# Altium PCB GesturaPCBLayout.PcbDoc (part 1 of 2)
Units mm, origin at the board's own origin, x right, y up, seen from the top; angles counter-clockwise.
Board outline 48.9 x 57.02 mm, 4 copper layers (Top Layer, Ground 1, Ground 2, Bottom Layer), stack 0.603 mm thick; 77 components, 66 nets, 315 pads, 197 vias.
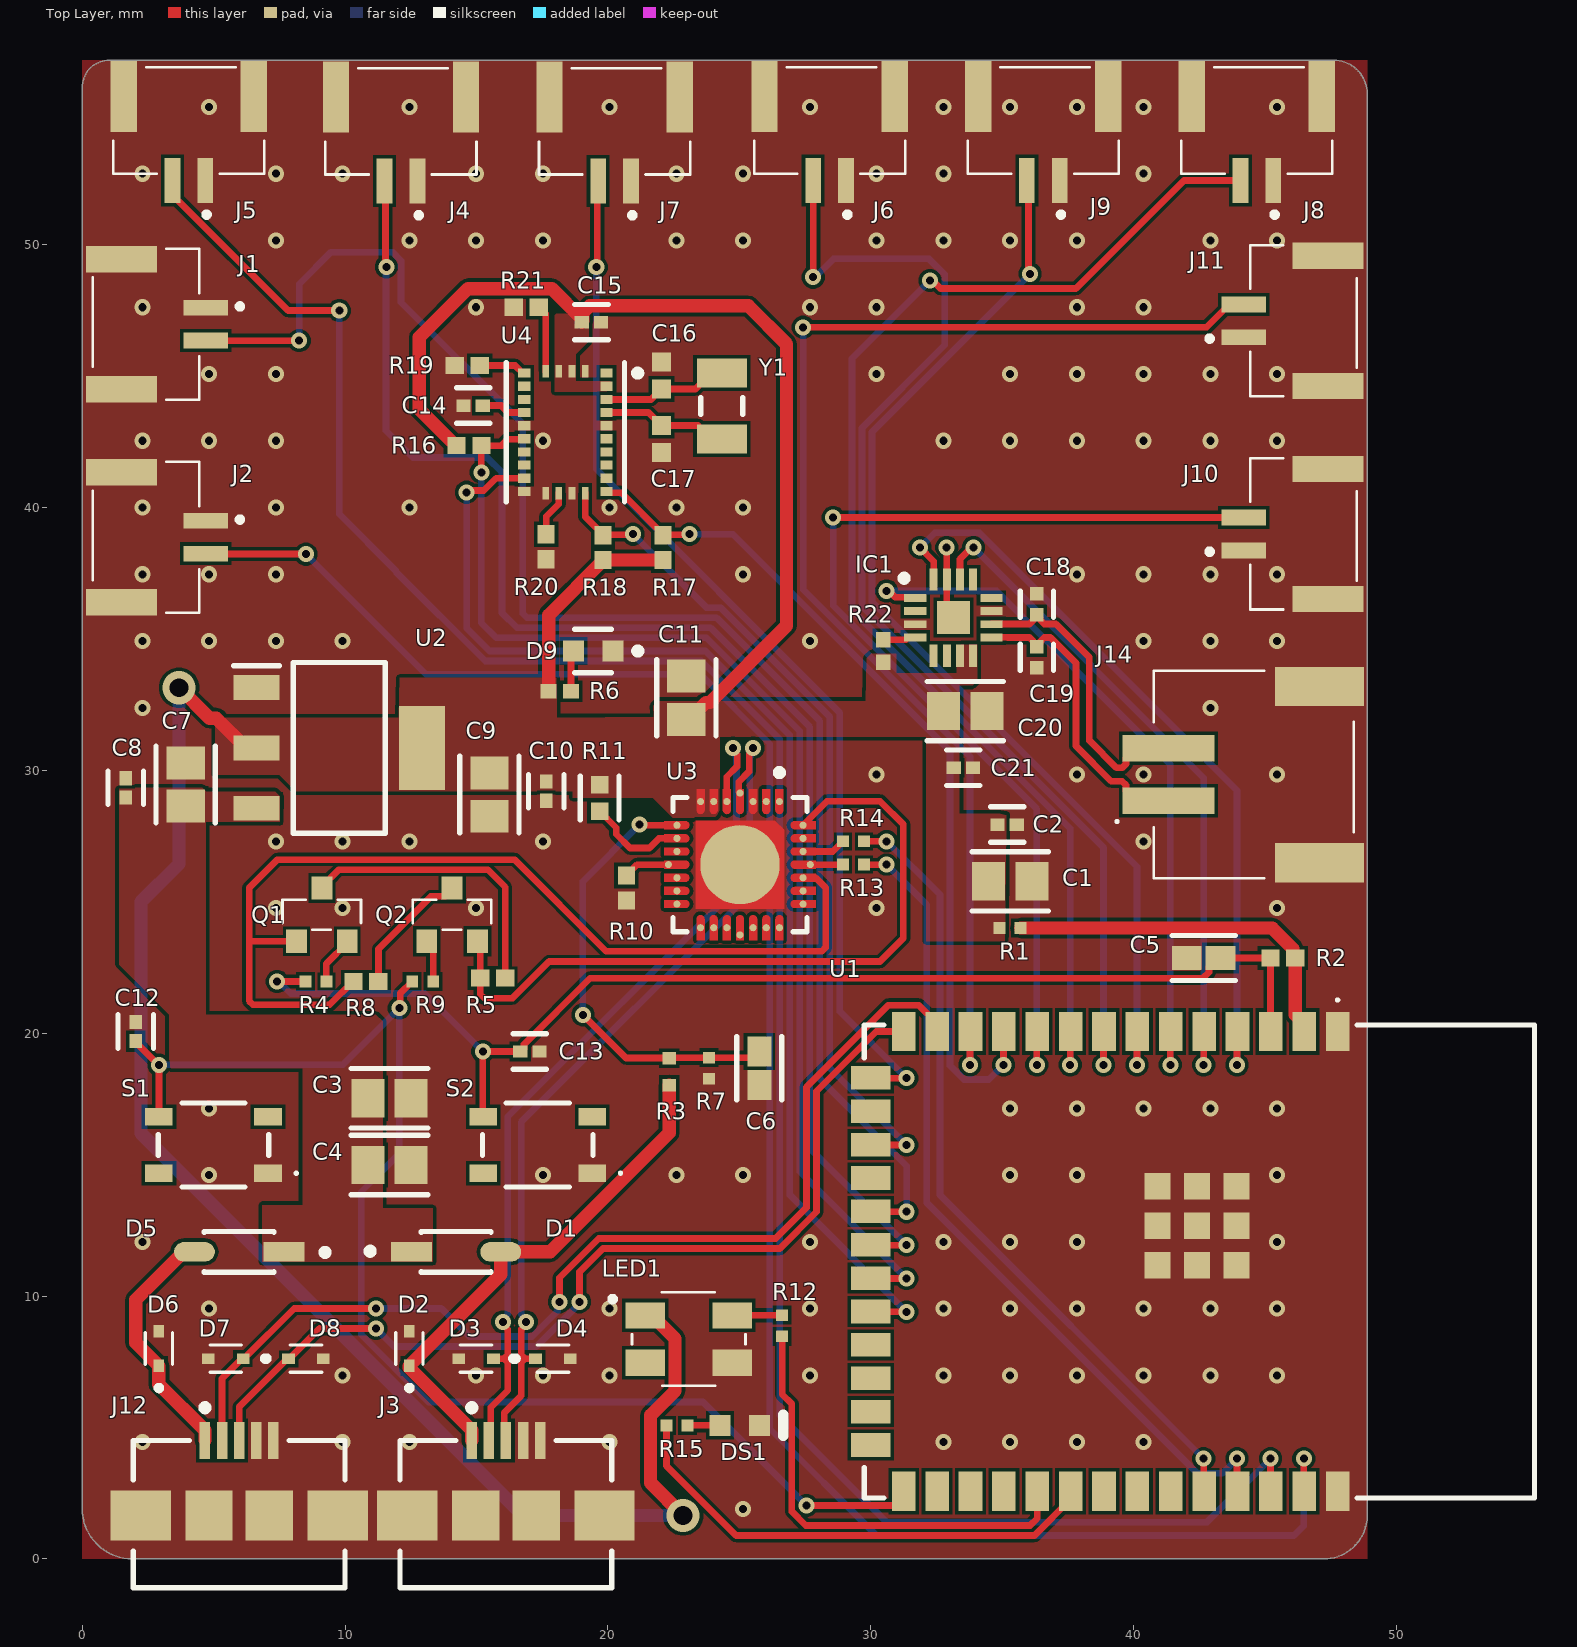
[diagram p0: Top Layer view]
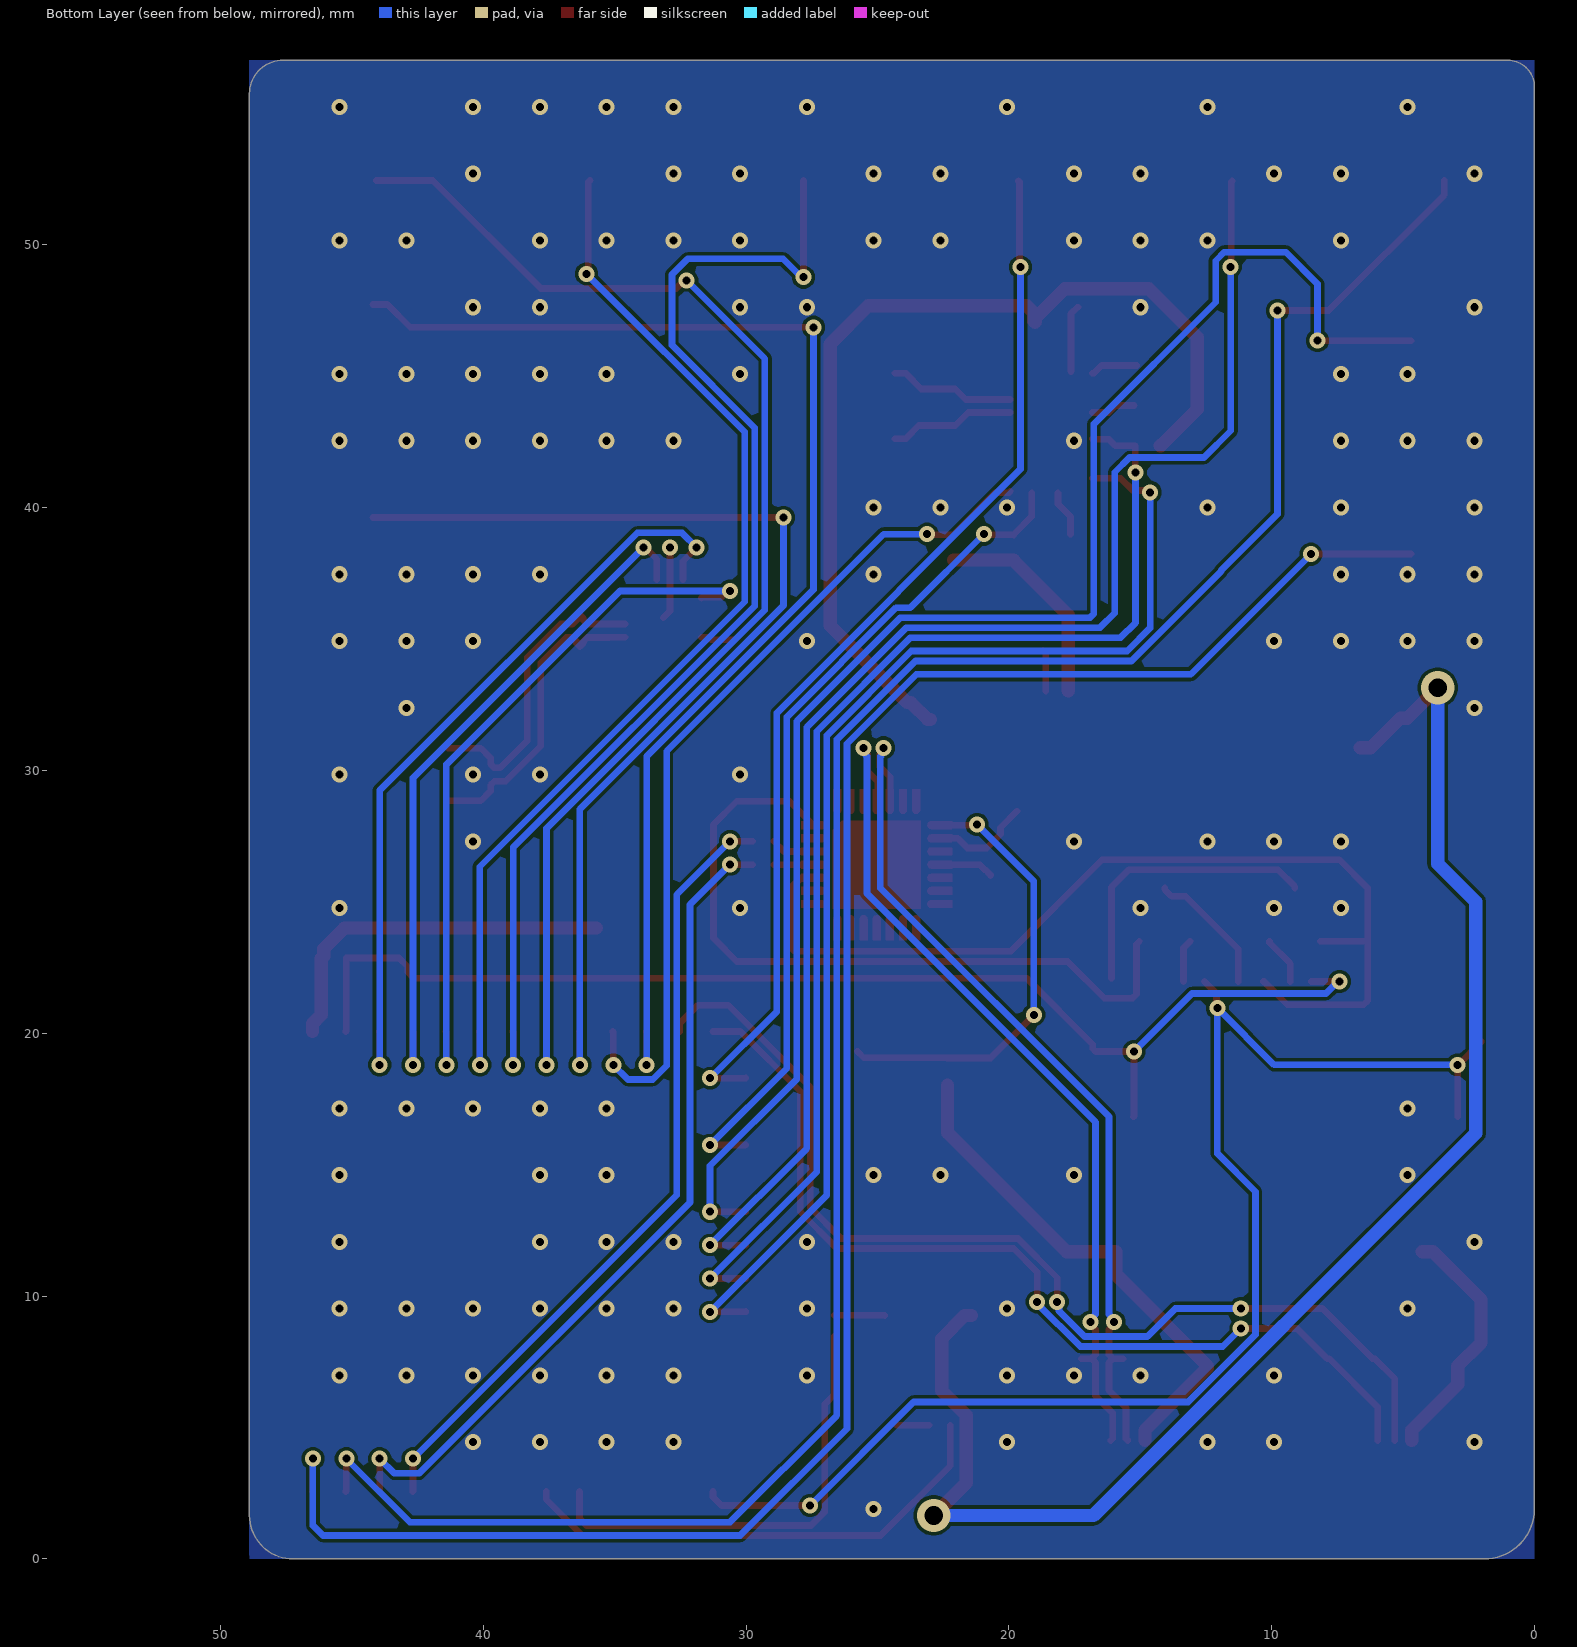
[diagram p1: Bottom Layer view, seen from below]
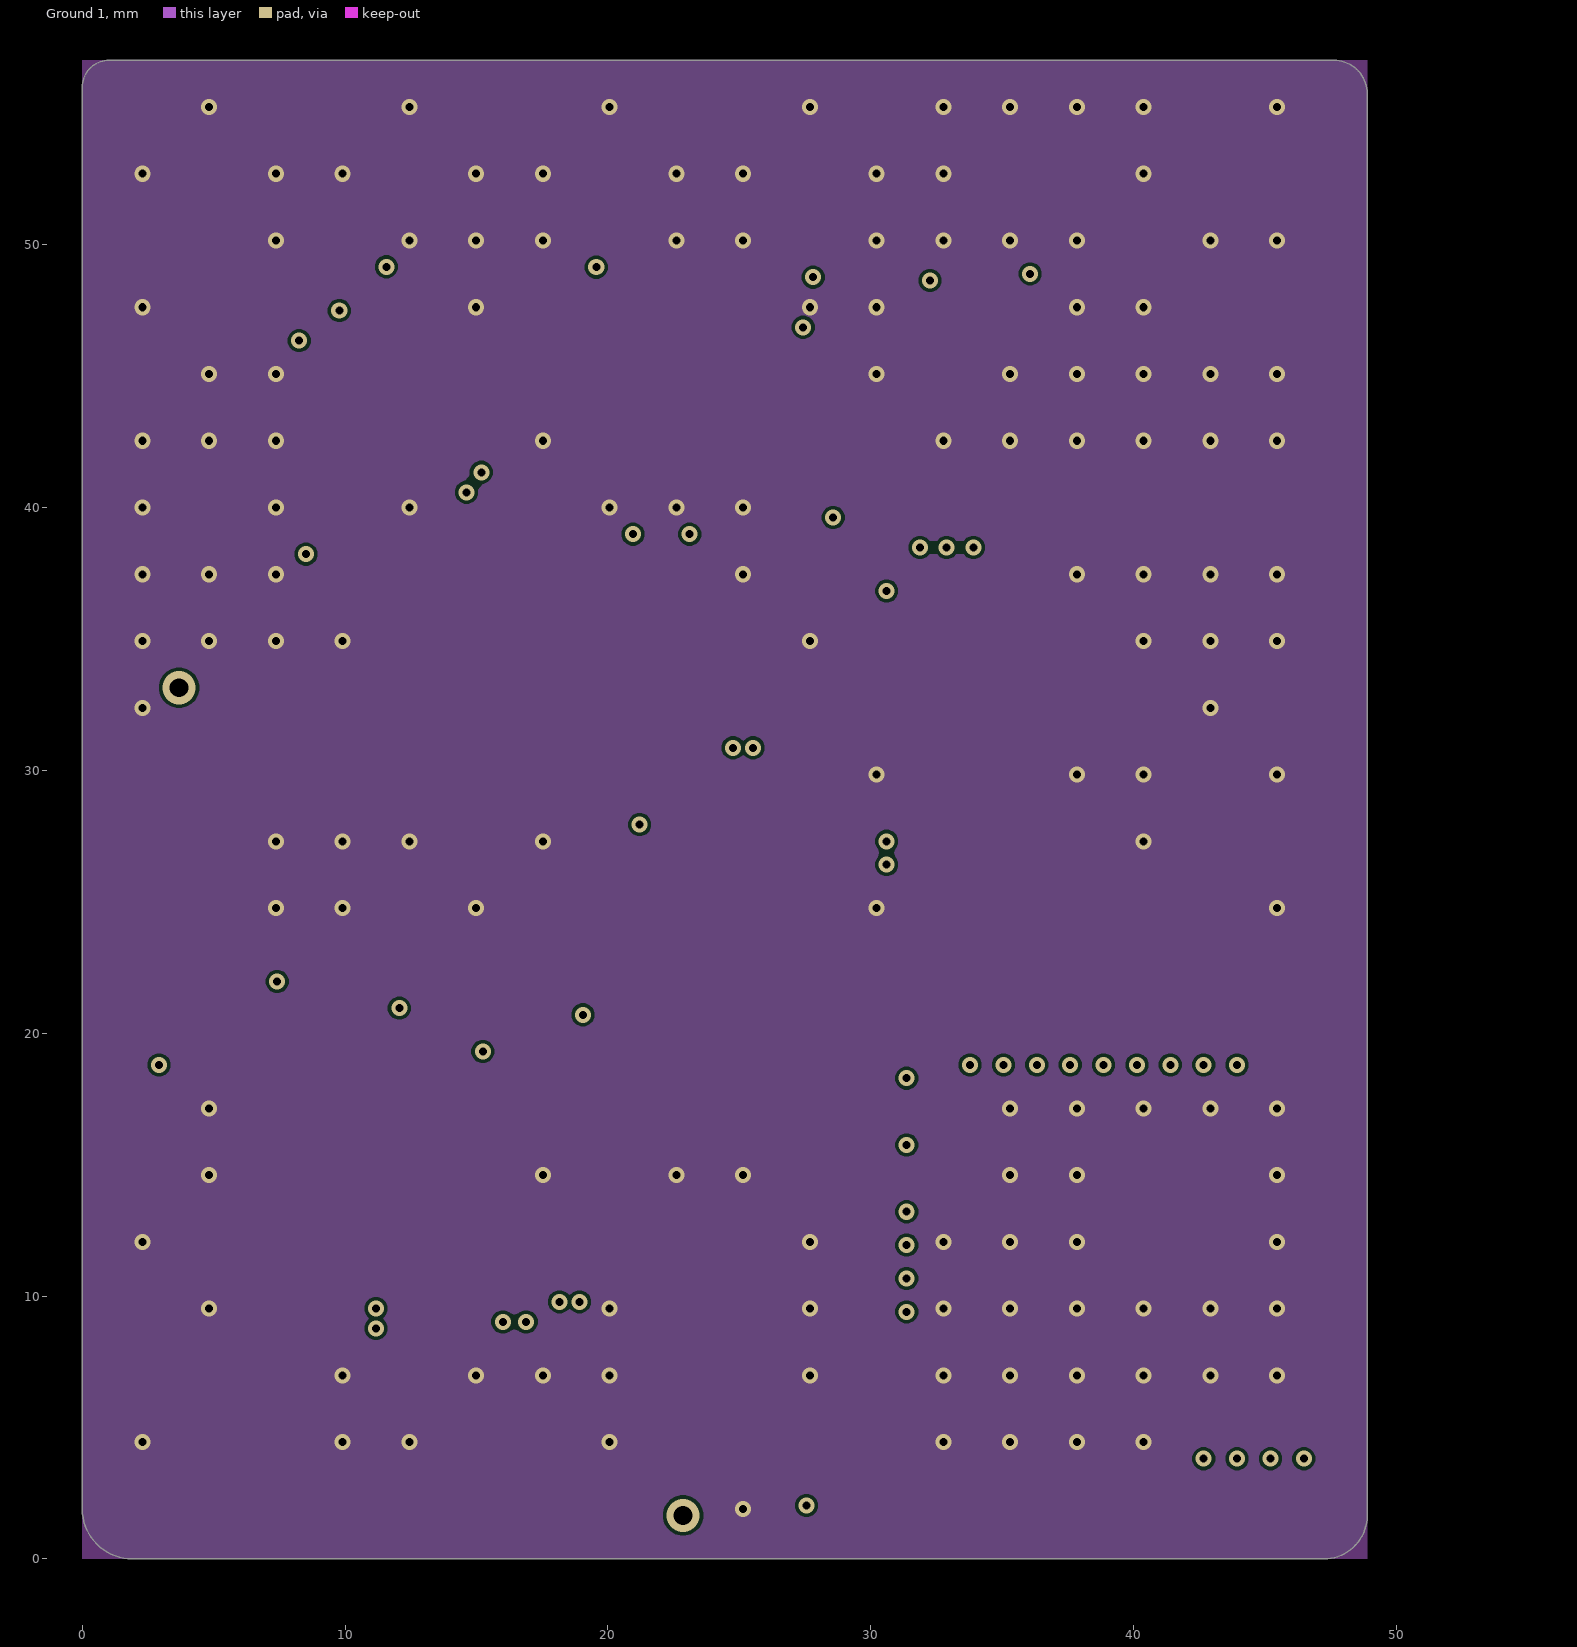
[diagram p2: Ground 1]
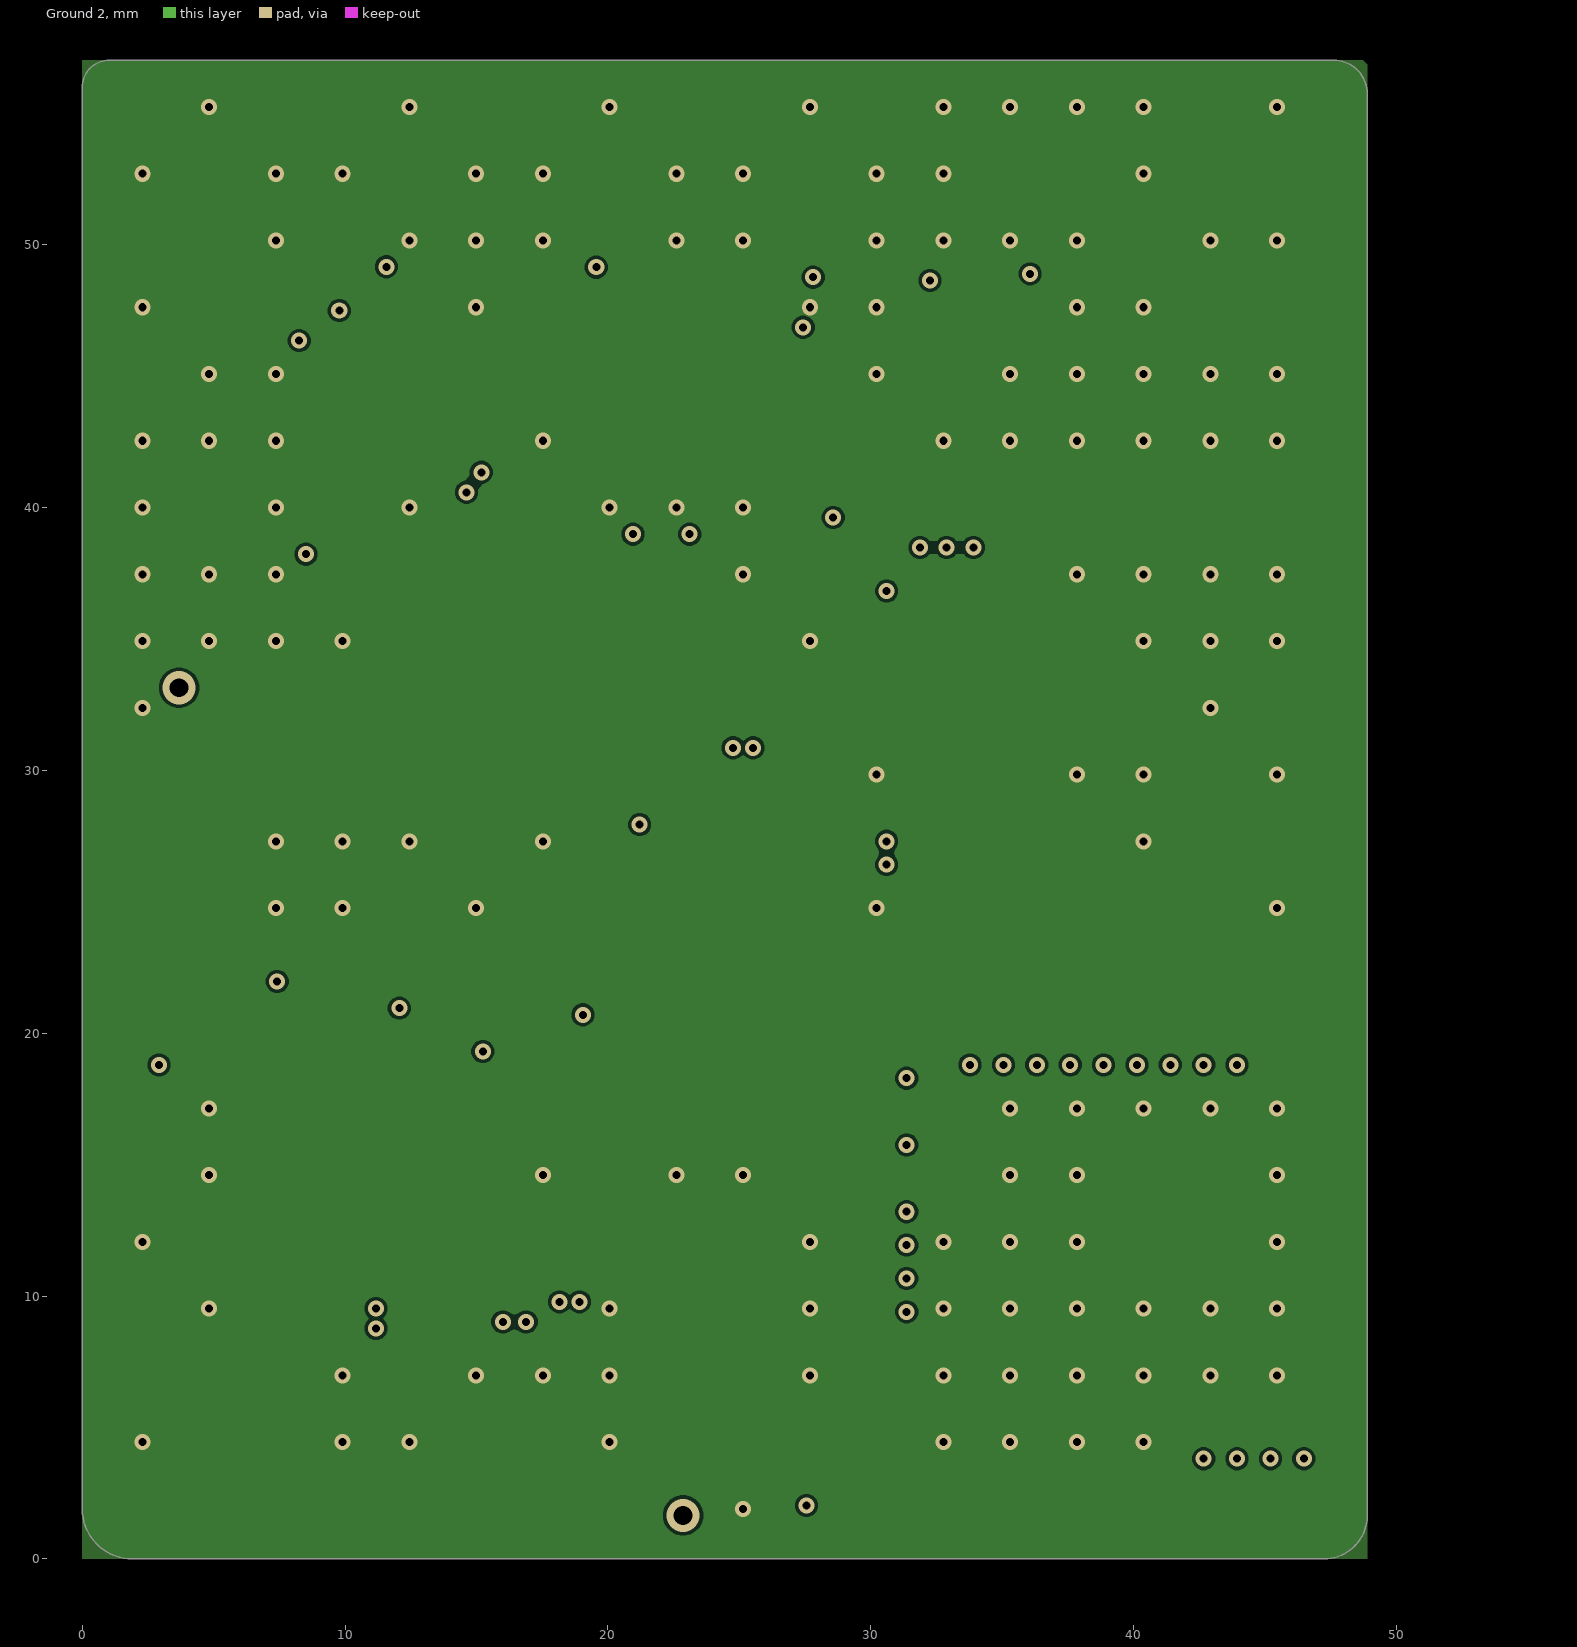
[diagram p3: Ground 2]
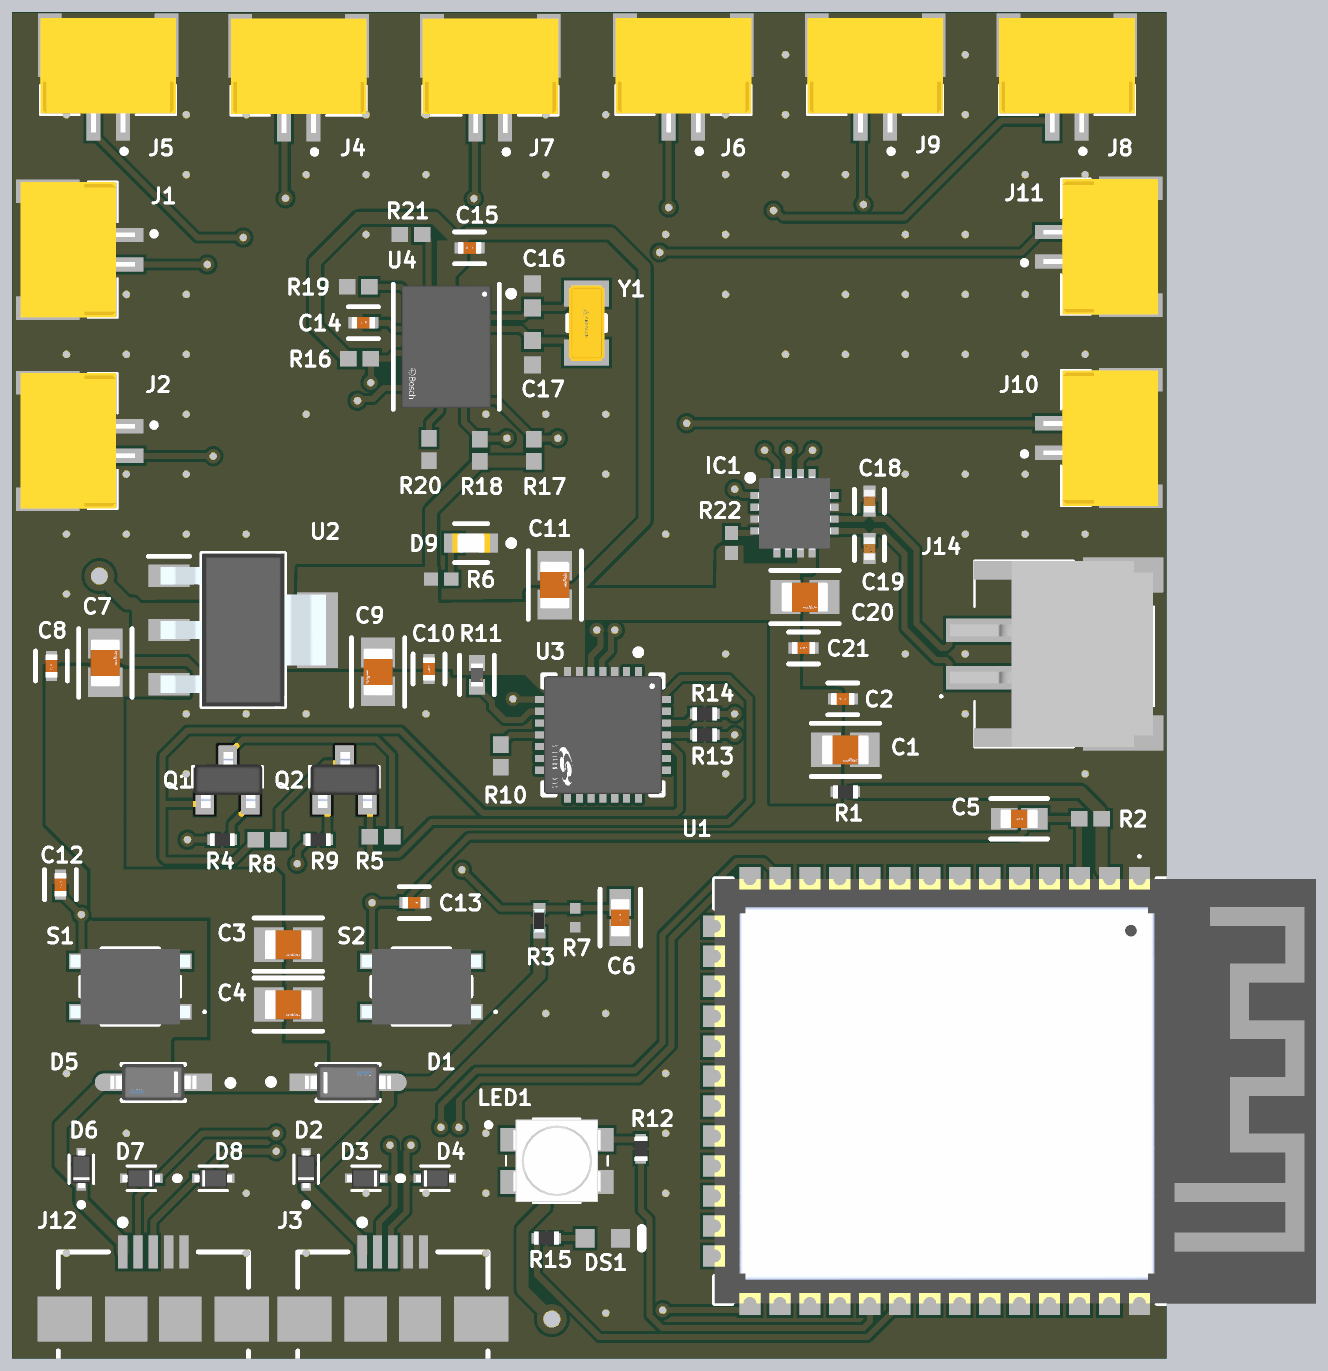
[diagram p4: 3D render of the assembled board from above, using the file's embedded part models]

## Layer stack, top to bottom
Top Solder: solder mask 0.0102, Solder Resist, Dk 3.5
Top Layer: signal copper 0.0356
Dielectric 2: prepreg 0.0711, PP-006, Dk 4.1
Ground 1: signal copper 0.035
Dielectric 1: dielectric 0.32, FR-4, Dk 4.8
Ground 2: signal copper 0.035
Dielectric 3: prepreg 0.0711, PP-006, Dk 4.1
Bottom Layer: signal copper 0.0356
Bottom Solder: solder mask 0.0102, Solder Resist, Dk 3.5

## Board outline
1.016,57.023 47.625,57.023 cw(c47.625,55.753) 48.895,55.753 48.895,1.651 cw(c47.244,1.651) 47.244,0 1.905,0 cw(c1.905,1.905) 0,1.905 0,56.007 cw(c1.016,56.007)

## Design rules (kind name [scope] priority, off if disabled: settings)
Clearance [All] p1: gap=0.127 ignorepadtopadclearanceinfootprint=FALSE
DiffPairsRouting [All] p1: maxlimit=0.254 minlimit=0.203 mostfreqgap=0.254 toplayer_minwidth=0.203 toplayer_maxwidth=0.381 toplayer_prefwidth=0.254 midlayer1_minwidth=0.203 midlayer1_maxwidth=0.381 midlayer1_prefwidth=0.254 midlayer2_minwidth=0.203 midlayer2_maxwidth=0.381 midlayer2_prefwidth=0.254 bottomlayer_minwidth=0.203 bottomlayer_maxwidth=0.381 bottomlayer_prefwidth=0.254 maxuncoupledlength=12.7
HoleSize [All] p1: absolutevalues=TRUE maxlimit=2.54 minlimit=0.015 maxpercent=80.000 minpercent=20.000
MinimumSolderMaskSliver [All] p1: minsoldermaskwidth=0.1
PolygonConnect [All] p1: connectstyle=Direct reliefconductorwidth=0.254 reliefentries=4 polygonreliefangle="90 Angle" airgapwidth=0.254
RoutingVias [All] p1: holewidth=0.305 width=0.61 viastyle="Through Hole" minholewidth=0.15 minwidth=0.25 maxholewidth=0.711 maxwidth=1.27
SilkToSilkClearance [All] p1: silktosilkclearance=0.127
SilkToSolderMaskClearance [IsPad] p1: minsilkscreentomaskgap=0.1 clearancetoexposedcopper=TRUE
SolderMaskExpansion SolderMaskExpansion_1 [IsVia] p1: expansion=0 istentingtop=TRUE
SolderMaskExpansion [All] p2: expansion=0 istentingtop=FALSE
SupplyNets "Schematic Supply Nets_5" [InNet('VCC_5V')] p1: voltage=0.000
SupplyNets "Schematic Supply Nets_4" [InNet('VBUSB')] p2: voltage=0.000
SupplyNets "Schematic Supply Nets_3" [InNet('VBUS')] p3: voltage=0.000
SupplyNets "Schematic Supply Nets_2" [InNet('ESP_3V3')] p4: voltage=0.000
SupplyNets "Schematic Supply Nets_1" [InNet('GND')] p5: voltage=0.000
SupplyNets "Schematic Supply Nets" [InNet('VCC_3V3')] p6: voltage=0.000
Width [All] p1: maxlimit=0.762 minlimit=0.254 preferedwidth=0.254
25 further rules are at their usual default settings.

## Classes and differential pairs
component class ESP32-S3_Devkit_Replica: C1 C2 C3 C4 C5 C6 C7 C8 C9 C10 C11 C12 C13 D1 D2 D3 D4 D5 D6 D7 D8 D9 DS1 J1 J2 J3 J4 J5 J6 J7 J8 J9 J10 J11 J12 LED1 Q1 Q2 R1 R2 R3 R4 R5 R6 R7 R8 R9 R10 R11 R12 R13 R14 R15 S1 S2 U1 U2 U3
component class ESP32-S3_Amplifier_and_IMU: C14 C15 C16 C17 C18 C19 C20 C21 IC1 J14 R16 R17 R18 R19 R20 R21 R22 U4 Y1
differential pair USB: +USB_P -USB_N
differential pair AUDIO: +AUDIO_P -AUDIO_N

## Components (designator, comment, footprint, x,y, rotation, side; value= is the part's Value field where it differs from the comment)
C1 "GRM21BC8YA106KE11L" FP-GRM21B-0_2-e0_2_0_7-IPC_B 35.306,25.781 r0 top
C2 "C1005X7R1H104K050BB" FP-C1005-050-0_05-IPC_C 35.193,27.94 r0 top
C3 "GRM21BC8YA106KE11L" FP-GRM21B-0_2-e0_2_0_7-IPC_B 11.69,17.526 r0 top
C4 "GRM21BC8YA106KE11L" FP-GRM21B-0_2-e0_2_0_7-IPC_B 11.69,14.986 r0 top
C5 "C1608X5R1H105K080AB" FP-C1608-080-0_1-IPC_B 42.672,22.86 r180 top
C6 "C1608X5R1H105K080AB" FP-C1608-080-0_1-IPC_B 25.762,18.669 r270 top
C7 "GRM21BC8YA106KE11L" FP-GRM21B-0_2-e0_2_0_7-IPC_B 3.937,29.464 r90 top
C8 "C1005X7R1H104K050BB" FP-C1005-050-0_05-IPC_C 1.651,29.337 r90 top
C9 "GRM21BC8YA106KE11L" FP-GRM21B-0_2-e0_2_0_7-IPC_B 15.494,29.083 r270 top
C10 "C1005X7R1H104K050BB" FP-C1005-050-0_05-IPC_C 17.653,29.21 r270 top
C11 "GRM21BC8YA106KE11L" FP-GRM21B-0_2-e0_2_0_7-IPC_B 22.987,32.766 r90 top
C12 "C1005X7R1H104K050BB" FP-C1005-050-0_05-IPC_C 2.032,20.066 r270 top
C13 "C1005X7R1H104K050BB" FP-C1005-050-0_05-IPC_C 17.032,19.304 r180 top
C14 "C1005X7R1H104K050BB" FP-C1005-050-0_05-IPC_C 14.875,43.884 r180 top
C15 "C1005X7R1H104K050BB" FP-C1005-050-0_05-IPC_C 19.374,47.059 r0 top
C16 "CC0402JRNPO9BN220" CAPC1005X55X25ML05T05 22.041,45.027 r90 top
C17 "CC0402JRNPO9BN220" CAPC1005X55X25ML05T05 22.041,42.614 r270 top
C18 "C0402C471J5GACAUTO" FP-C0402-BB-MFG 36.322,36.322 r90 top value="470 pF"
C19 "C0402C471J5GACAUTO" FP-C0402-BB-MFG 36.322,34.309 r270 top value="470 pF"
C20 "GRM21BC8YA106KE11L" FP-GRM21B-0_2-e0_2_0_7-IPC_B 33.592,32.258 r0 top
C21 "C1005X7R1H104K050BB" FP-C1005-050-0_05-IPC_C 33.528,30.099 r0 top
D1 "1N5819HW-7-F" FP-SOD123-IPC_A 14.224,11.684 r0 top
D2 "LESD5D5.0CT1G" TVS_LESD5D5.0CT1G 12.446,8.001 r90 top
D3 "LESD5D5.0CT1G" TVS_LESD5D5.0CT1G 14.986,7.62 r180 top
D4 "LESD5D5.0CT1G" TVS_LESD5D5.0CT1G 17.907,7.62 r0 top
D5 "1N5819HW-7-F" FP-SOD123-IPC_A 5.969,11.684 r180 top
D6 "LESD5D5.0CT1G" TVS_LESD5D5.0CT1G 2.916,8.001 r90 top
D7 "LESD5D5.0CT1G" TVS_LESD5D5.0CT1G 5.461,7.62 r180 top
D8 "LESD5D5.0CT1G" TVS_LESD5D5.0CT1G 8.509,7.62 r0 top
D9 "LTST-C193KRKT-5A" FP-LTST-C193KRKT-5A-MFG 19.439,34.544 r180 top
DS1 "HSMG-C190" AVAG-HSMX-C190_V 25.019,5.08 r0 top
IC1 "MAX98357AETE+T" QFN50P300X300X80-17N 33.147,35.814 r0 top
J1 "SM02B-GHS-TB_LF__SN_" SM02BGHSTBLFSN 0.399,45.755 r270 top
J2 "SM02B-GHS-TB_LF__SN_" SM02BGHSTBLFSN 0.399,37.647 r270 top
J3 "10104110-0001LF" FCI-10104110-0001LF_V 16.122,3.076 r0 top
J4 "SM02B-GHS-TB_LF__SN_" SM02BGHSTBLFSN 10.902,56.726 r180 top
J5 "SM02B-GHS-TB_LF__SN_" SM02BGHSTBLFSN 2.829,56.751 r180 top
J6 "SM02B-GHS-TB_LF__SN_" SM02BGHSTBLFSN 27.213,56.751 r180 top
J7 "SM02B-GHS-TB_LF__SN_" SM02BGHSTBLFSN 19.03,56.726 r180 top
J8 "SM02B-GHS-TB_LF__SN_" SM02BGHSTBLFSN 43.469,56.751 r180 top
J9 "SM02B-GHS-TB_LF__SN_" SM02BGHSTBLFSN 35.341,56.751 r180 top
J10 "SM02B-GHS-TB_LF__SN_" SM02BGHSTBLFSN 48.496,40.224 r90 top
J11 "SM02B-GHS-TB_LF__SN_" SM02BGHSTBLFSN 48.496,48.332 r90 top
J12 "10104110-0001LF" FCI-10104110-0001LF_V 5.969,3.076 r0 top
J14 "S2B-PH-SM4-TB_LF__SN_" S2BPHSM4TBLFSN 44.577,29.845 r270 top
LED1 "SK6812MINI-HS" SK6812MINI-HS 23.076,8.362 r0 top
Q1 "L8050QLT1G" L8050QLT1G 9.144,24.511 r180 top
Q2 "L8050QLT1G" L8050QLT1G 14.097,24.511 r180 top
R1 "ERJ2GE0R00X" RESC1005X40X25LL05T05 35.306,24.003 r0 top
R2 "CRCW040210K0FKEDHP" RESC1005X40X25ML05T10 45.687,22.86 r0 top
R3 "ERA2AEB2212X" RES_ERA2AEB2212X 22.333,18.542 r270 top value=22.1k
R4 "ERJ2GE0R00X" RESC1005X40X25LL05T05 8.89,21.971 r180 top
R5 "CRCW040210K0FKEDHP" RESC1005X40X25ML05T10 15.621,22.098 r180 top
R6 "RC0402FR-075K1L" RESC1005X40X25NL05T10 18.169,33.02 r180 top
R7 "CRCW040247K5FKTD" RESC1005X40X25LL05T05 23.849,18.669 r270 top
R8 "CRCW040210K0FKEDHP" RESC1005X40X25ML05T10 10.795,21.971 r180 top
R9 "ERJ2GE0R00X" RESC1005X40X25LL05T05 12.954,21.971 r180 top
R10 "CRCW040210K0FKEDHP" RESC1005X40X25ML05T10 20.701,25.527 r270 top
R11 "TFCR0402-16W-C-1001BT-1K" FP-TFCR0402-IPC_A 19.685,28.956 r270 top
R12 "ERJ2GE0R00X" RESC1005X40X25LL05T05 26.632,8.87 r90 top
R13 "ERJ2GE0R00X" RESC1005X40X25LL05T05 29.345,26.416 r0 top
R14 "ERJ2GE0R00X" RESC1005X40X25LL05T05 29.345,27.305 r0 top
R15 "ERJ-2RKF1000X" RESC1005X40X25LL05T05 22.63,5.08 r180 top
R16 "CRCW040210K0FKEDHP" RESC1005X40X25ML05T10 14.715,42.36 r180 top
R17 "CRCW040210K0FKEDHP" RESC1005X40X25ML05T10 22.098,38.481 r270 top
R18 "CRCW040210K0FKEDHP" RESC1005X40X25ML05T10 19.812,38.481 r270 top
R19 "CRCW040210K0FKEDHP" RESC1005X40X25ML05T10 14.654,45.408 r0 top
R20 "CRCW040210K0FKEDHP" RESC1005X40X25ML05T10 17.653,38.514 r270 top
R21 "CRCW040210K0FKEDHP" RESC1005X40X25ML05T10 16.891,47.625 r0 top
R22 "RC0402FR-07100KL" RESC1005X40X25NL05T10 30.48,34.544 r270 top
S1 "NTC013-AT1J-A160T" NTC013AT1JA160T 4.991,15.748 r180 top
S2 "NTC013-AT1J-A160T" NTC013AT1JA160T 17.33,15.748 r180 top
U1 "ESP32-S3-WROOM-2-N32R16V" ESP32S3WROOM2N32R16V 42.508,11.316 r270 top
U2 "SGM2212-3.3XKC3G/TR" SOT230P700X180-4N 9.779,30.861 r0 top
U3 "CP2102N-A02-GQFN28" FP-CP2102N-A02-GQFN28-MFG 25.027,26.416 r270 top
U4 "BNO055" FP-BNO055-MFG 18.385,42.868 r0 top
Y1 "ABS07-32.768KHZ-T" FP-ABS07-MFG 24.335,43.868 r270 top

## Footprints (in the part's own frame and the unit in brackets; to place one, negate y for a bottom-side part, rotate by r counter-clockwise, add the part's x,y. Pads: shape width x height; smd on the part's side, far side on the other; paste and mask are expansions set on the pad)
AVAG-HSMX-C190_V [mm] "SMD, 2-Leads, Body 1.6x0.8mm, Height 0.9mm"
  rect 0.8x0.8 smd: 1(-0.75,0) 2(0.75,0)
  silkscreen extent 1.65,-0.4 1.65,0.4, body extent -0.8,-0.4 0.8,0.4, height 0.9
CAPC1005X55X25ML05T05 [mm] "Chip Capacitor, 2-Leads, Body 1.00x0.50mm, IPC Low Density"
  rect 0.72x0.72 smd: 1(-0.51,0) 2(0.51,0)
  body extent -0.53,-0.28 0.53,0.27, height 0.55
ESP32S3WROOM2N32R16V [mm]
  rect 1.5x0.9 smd: 1(-8.75,5.26) 2(-8.75,3.99) 3(-8.75,2.72) 4(-8.75,1.45) 5(-8.75,0.18) 6(-8.75,-1.09) 7(-8.75,-2.36) 8(-8.75,-3.63) 9(-8.75,-4.9) 10(-8.75,-6.17) 11(-8.75,-7.44) 12(-8.75,-8.71) 13(-8.75,-9.98) 14(-8.75,-11.25) 27(8.75,-11.25) 28(8.75,-9.98) 29(8.75,-8.71) 30(8.75,-7.44) 31(8.75,-6.17) 32(8.75,-4.9) 33(8.75,-3.63) 34(8.75,-2.36) 35(8.75,-1.09) 36(8.75,0.18) 37(8.75,1.45) 38(8.75,2.72) 39(8.75,3.99) 40(8.75,5.26)
  rect 0.9x1.5 smd: 15(-6.985,-12.5) 16(-5.715,-12.5) 17(-4.445,-12.5) 18(-3.175,-12.5) 19(-1.905,-12.5) 20(-0.635,-12.5) 21(0.635,-12.5) 22(1.905,-12.5) 23(3.175,-12.5) 24(4.445,-12.5) 25(5.715,-12.5) 26(6.985,-12.5)
  rect 1x1 smd: 41(-1.36,-0.09) 42(-2.86,1.41) 43(-2.86,-0.09) 44(-2.86,-1.59) 45(-1.36,-1.59) 46(0.14,-1.59) 47(0.14,-0.09) 48(0.14,1.41) 49(-1.36,1.41)
  silkscreen extent -10,-12.75 9,12.75, body extent -9,-12.75 9,12.75, height 3.25
FCI-10104110-0001LF_V [mm] "SMD, 5-Leads, Body 8.06x5.6mm, Pitch 0.65mm"
  rect 0.4x1.4 smd: 1(-1.3,1.425) 2(-0.65,1.425) 3(0,1.425) 4(0.65,1.425) 5(1.3,1.425)
  rect 1.8x1.9 smd: 6(-1.15,-1.425) 7(1.15,-1.425)
  rect 2.3x1.9 smd: 8(-3.75,-1.425) 9(3.75,-1.425)
  silkscreen extent -4.03,-4.17 4.03,2.8, body extent -4.03,-4.17 4.03,1.43, height 2.95
FP-ABS07-MFG [mm]
  rect 1.1x1.9 smd paste+0 mask+0: 1(-1.25,0) 2(1.25,0)
  silkscreen extent -0.33,-0.8 0.33,0.8, body extent -1.9,-1.05 1.9,1.05, height 0.25
FP-BNO055-MFG [mm]
  rect 0.475x0.35 smd paste+0 mask-1000: 1(1.562,2.25) 6(-1.562,2.25) 7(-1.562,1.75) 8(-1.562,1.25) 9(-1.562,0.75) 10(-1.562,0.25) 11(-1.562,-0.25) 12(-1.562,-0.75) 13(-1.562,-1.25) 14(-1.562,-1.75) 15(-1.562,-2.25) 20(1.562,-2.25) 21(1.562,-1.75) 22(1.562,-1.25) 23(1.562,-0.75) 24(1.562,-0.25) 25(1.562,0.25) 26(1.562,0.75) 27(1.562,1.25) 28(1.562,1.75)
  rect 0.25x0.475 smd paste+0 mask-1000: 2(0.75,2.312) 3(0.25,2.312) 4(-0.25,2.312) 5(-0.75,2.312) 16(-0.75,-2.312) 17(-0.25,-2.312) 18(0.25,-2.312) 19(0.75,-2.312)
  silkscreen extent -2.25,-2.65 2.88,2.65, body extent -2.45,-3.15 2.45,3.15, height 0.25
FP-C0402-BB-MFG [mm]
  rect 0.52x0.52 smd paste+0 mask+0: 1(-0.4,0) 2(0.4,0)
  silkscreen extent -0.5,-0.64 0.5,0.64, body extent -0.8,-0.4 0.8,0.4, height 0.25
FP-C1005-050-0_05-IPC_C [mm]
  rect 0.539x0.472 smd paste+0 mask+0: 1(-0.367,0) 2(0.367,0)
  silkscreen extent -0.64,-0.67 0.64,0.67, body extent -0.74,-0.38 0.74,0.38, height 0.25
FP-C1608-080-0_1-IPC_B [mm]
  rect 1.131x0.912 smd paste+0 mask+0: 1(-0.641,0) 2(0.641,0)
  silkscreen extent -1.21,-0.86 1.21,0.86, body extent -1.46,-0.71 1.46,0.71, height 0.25
FP-CP2102N-A02-GQFN28-MFG [mm]
  round 0.27 smd paste+0 mask+0: 1(-2.4,1.5) 2(-2.4,1) 3(-2.4,0.5) 4(-2.725,0) 5(-2.4,-0.5) 6(-2.4,-1) 7(-2.4,-1.5) 8(-1.5,-2.4) 9(-1,-2.4) 10(-0.5,-2.4) 11(0,-2.725) 12(0.5,-2.4) 13(1,-2.4) 14(1.5,-2.4) 15(2.4,-1.5) 16(2.4,-1) 17(2.4,-0.5) 18(2.675,0) 19(2.4,0.5) 20(2.4,1) 21(2.4,1.5) 22(1.5,2.4) 23(1,2.4) 24(0.5,2.4) 25(0,2.675) 26(-0.5,2.4) 27(-1,2.4) 28(-1.5,2.4)
  round 3.015 smd paste-1000 mask+0: 29(0,0)
  Top Layer region: -2.875,0.65 -2.075,0.65 -2.018,0.639 -1.969,0.606 -1.936,0.557 -1.925,0.5 -1.925,0.5 -1.936,0.443 -1.969,0.394 -2.018,0.361 -2.075,0.35 -2.075,0.35 -2.875,0.35
  Top Layer region: -2.875,-0.85 -2.075,-0.85 -2.018,-0.861 -1.969,-0.894 -1.936,-0.943 -1.925,-1 -1.925,-1 -1.936,-1.057 -1.969,-1.106 -2.018,-1.139 -2.075,-1.15 -2.075,-1.15 -2.875,-1.15
  Top Layer region: -2.875,-1.35 -2.075,-1.35 -2.018,-1.361 -1.969,-1.394 -1.936,-1.443 -1.925,-1.5 -1.925,-1.5 -1.936,-1.557 -1.969,-1.606 -2.018,-1.639 -2.075,-1.65 -2.075,-1.65 -2.875,-1.65
  Top Layer region: 0.65,2.875 0.65,2.075 0.639,2.018 0.606,1.969 0.557,1.936 0.5,1.925 0.5,1.925 0.443,1.936 0.394,1.969 0.361,2.018 0.35,2.075 0.35,2.075 0.35,2.875
  Top Layer region: -1.35,2.875 -1.35,2.075 -1.361,2.018 -1.394,1.969 -1.443,1.936 -1.5,1.925 -1.5,1.925 -1.557,1.936 -1.606,1.969 -1.639,2.018 -1.65,2.075 -1.65,2.075 -1.65,2.875
  Top Layer region: -0.85,2.875 -0.85,2.075 -0.861,2.018 -0.894,1.969 -0.943,1.936 -1,1.925 -1,1.925 -1.057,1.936 -1.106,1.969 -1.139,2.018 -1.15,2.075 -1.15,2.075 -1.15,2.875
  Top Layer region: -0.35,2.875 -0.35,2.075 -0.361,2.018 -0.394,1.969 -0.443,1.936 -0.5,1.925 -0.5,1.925 -0.557,1.936 -0.606,1.969 -0.639,2.018 -0.65,2.075 -0.65,2.075 -0.65,2.875
  Top Layer region: 0.15,2.875 0.15,2.075 0.139,2.018 0.106,1.969 0.057,1.936 0,1.925 0,1.925 -0.057,1.936 -0.106,1.969 -0.139,2.018 -0.15,2.075 -0.15,2.075 -0.15,2.875
  Top Layer region: 1.15,2.875 1.15,2.075 1.139,2.018 1.106,1.969 1.057,1.936 1,1.925 1,1.925 0.943,1.936 0.894,1.969 0.861,2.018 0.85,2.075 0.85,2.075 0.85,2.875
  Top Layer region: 1.65,2.875 1.65,2.075 1.639,2.018 1.606,1.969 1.557,1.936 1.5,1.925 1.5,1.925 1.443,1.936 1.394,1.969 1.361,2.018 1.35,2.075 1.35,2.075 1.35,2.875
  Top Layer region: 1.35,-2.875 1.35,-2.075 1.361,-2.018 1.394,-1.969 1.443,-1.936 1.5,-1.925 1.5,-1.925 1.557,-1.936 1.606,-1.969 1.639,-2.018 1.65,-2.075 1.65,-2.075 1.65,-2.875
  Top Layer region: 0.85,-2.875 0.85,-2.075 0.861,-2.018 0.894,-1.969 0.943,-1.936 1,-1.925 1,-1.925 1.057,-1.936 1.106,-1.969 1.139,-2.018 1.15,-2.075 1.15,-2.075 1.15,-2.875
  Top Layer region: 0.35,-2.875 0.35,-2.075 0.361,-2.018 0.394,-1.969 0.443,-1.936 0.5,-1.925 0.5,-1.925 0.557,-1.936 0.606,-1.969 0.639,-2.018 0.65,-2.075 0.65,-2.075 0.65,-2.875
  Top Layer region: -0.15,-2.875 -0.15,-2.075 -0.139,-2.018 -0.106,-1.969 -0.057,-1.936 0,-1.925 0,-1.925 0.057,-1.936 0.106,-1.969 0.139,-2.018 0.15,-2.075 0.15,-2.075 0.15,-2.875
  Top Layer region: -0.65,-2.875 -0.65,-2.075 -0.639,-2.018 -0.606,-1.969 -0.557,-1.936 -0.5,-1.925 -0.5,-1.925 -0.443,-1.936 -0.394,-1.969 -0.361,-2.018 -0.35,-2.075 -0.35,-2.075 -0.35,-2.875
  Top Layer region: -1.15,-2.875 -1.15,-2.075 -1.139,-2.018 -1.106,-1.969 -1.057,-1.936 -1,-1.925 -1,-1.925 -0.943,-1.936 -0.894,-1.969 -0.861,-2.018 -0.85,-2.075 -0.85,-2.075 -0.85,-2.875
  Top Layer region: -1.65,-2.875 -1.65,-2.075 -1.639,-2.018 -1.606,-1.969 -1.557,-1.936 -1.5,-1.925 -1.5,-1.925 -1.443,-1.936 -1.394,-1.969 -1.361,-2.018 -1.35,-2.075 -1.35,-2.075 -1.35,-2.875
  Top Layer region: 2.875,1.35 2.075,1.35 2.018,1.361 1.969,1.394 1.936,1.443 1.925,1.5 1.925,1.5 1.936,1.557 1.969,1.606 2.018,1.639 2.075,1.65 2.075,1.65 2.875,1.65
  Top Layer region: 2.875,0.85 2.075,0.85 2.018,0.861 1.969,0.894 1.936,0.943 1.925,1 1.925,1 1.936,1.057 1.969,1.106 2.018,1.139 2.075,1.15 2.075,1.15 2.875,1.15
  Top Layer region: 2.875,0.35 2.075,0.35 2.018,0.361 1.969,0.394 1.936,0.443 1.925,0.5 1.925,0.5 1.936,0.557 1.969,0.606 2.018,0.639 2.075,0.65 2.075,0.65 2.875,0.65
  Top Layer region: 2.875,-0.15 2.075,-0.15 2.018,-0.139 1.969,-0.106 1.936,-0.057 1.925,0 1.925,0 1.936,0.057 1.969,0.106 2.018,0.139 2.075,0.15 2.075,0.15 2.875,0.15
  Top Layer region: 2.875,-0.65 2.075,-0.65 2.018,-0.639 1.969,-0.606 1.936,-0.557 1.925,-0.5 1.925,-0.5 1.936,-0.443 1.969,-0.394 2.018,-0.361 2.075,-0.35 2.075,-0.35 2.875,-0.35
  Top Layer region: 2.875,-1.15 2.075,-1.15 2.018,-1.139 1.969,-1.106 1.936,-1.057 1.925,-1 1.925,-1 1.936,-0.943 1.969,-0.894 2.018,-0.861 2.075,-0.85 2.075,-0.85 2.875,-0.85
  Top Layer region: 2.875,-1.65 2.075,-1.65 2.018,-1.639 1.969,-1.606 1.936,-1.557 1.925,-1.5 1.925,-1.5 1.936,-1.443 1.969,-1.394 2.018,-1.361 2.075,-1.35 2.075,-1.35 2.875,-1.35
  Top Layer region: -2.875,-0.35 -2.075,-0.35 -2.018,-0.361 -1.969,-0.394 -1.936,-0.443 -1.925,-0.5 -1.925,-0.5 -1.936,-0.557 -1.969,-0.606 -2.018,-0.639 -2.075,-0.65 -2.075,-0.65 -2.875,-0.65
  Top Layer region: -2.875,0.15 -2.075,0.15 -2.018,0.139 -1.969,0.106 -1.936,0.057 -1.925,0 -1.925,0 -1.936,-0.057 -1.969,-0.106 -2.018,-0.139 -2.075,-0.15 -2.075,-0.15 -2.875,-0.15
  Top Layer region: -2.875,1.15 -2.075,1.15 -2.018,1.139 -1.969,1.106 -1.936,1.057 -1.925,1 -1.925,1 -1.936,0.943 -1.969,0.894 -2.018,0.861 -2.075,0.85 -2.075,0.85 -2.875,0.85
  Top Layer region: -2.875,1.65 -2.075,1.65 -2.018,1.639 -1.969,1.606 -1.936,1.557 -1.925,1.5 -1.925,1.5 -1.936,1.443 -1.969,1.394 -2.018,1.361 -2.075,1.35 -2.075,1.35 -2.875,1.35
  Top Layer region: -1.675,1.325 -1.325,1.675 1.675,1.675 1.675,-1.675 -1.675,-1.675 -1.675,1.325
  silkscreen extent -3.62,-2.55 2.55,2.55, body extent -2.98,-2.98 2.98,2.98, height 0.25
FP-GRM21B-0_2-e0_2_0_7-IPC_B [mm]
  rect 1.255x1.456 smd paste+0 mask+0: 1(-0.826,0) 2(0.826,0)
  silkscreen extent -1.45,-1.13 1.45,1.13, body extent -1.7,-0.98 1.7,0.98, height 0.25
FP-LTST-C193KRKT-5A-MFG [mm]
  rect 0.8x0.8 smd paste+0 mask+0: 1(-0.75,0) 2(0.75,0)
  silkscreen extent -1.83,-0.82 0.7,0.82, body extent -1.25,-0.55 1.25,0.55, height 0.25
FP-SOD123-IPC_A [mm]
  rect 1.557x0.742 smd paste+0 mask+0: 1(-1.7,0)
  rrect100% 1.557x0.742 smd paste+0 mask+0: 2(1.7,0)
  silkscreen extent -3.39,-0.77 1.33,0.77, body extent -2.98,-1.28 2.98,1.28, height 0.25
FP-TFCR0402-IPC_A [mm]
  rect 0.665x0.672 smd paste+0 mask+0: 1(-0.504,0) 2(0.504,0)
  silkscreen extent -0.84,-0.74 0.84,0.74, body extent -1.04,-0.54 1.04,0.54, height 0.25
L8050QLT1G [mil]
  rect 31x35 smd paste+0 mask+4.02: 1(-37,40) 2(39,40) 3(1,-40)
  silkscreen extent -58,-23 60,23, body extent -57,-47 57,47, height 44
NTC013AT1JA160T [mm]
  rect 1.05x0.65 smd: 1(-2.075,1.075) 2(2.075,1.075) 3(-2.075,-1.075) 4(2.075,-1.075)
  silkscreen extent -3.2,-1.6 2.1,1.6, body extent -2.53,-1.6 2.53,1.6, height 2.8
QFN50P300X300X80-17N [mm]
  rect 0.85x0.3 smd: 1(-1.45,0.75) 2(-1.45,0.25) 3(-1.45,-0.25) 4(-1.45,-0.75) 9(1.45,-0.75) 10(1.45,-0.25) 11(1.45,0.25) 12(1.45,0.75)
  rect 0.3x0.85 smd: 5(-0.75,-1.45) 6(-0.25,-1.45) 7(0.25,-1.45) 8(0.75,-1.45) 13(0.75,1.45) 14(0.25,1.45) 15(-0.25,1.45) 16(-0.75,1.45)
  rect 1.25x1.25 smd: 17(0,0)
  silkscreen extent -2,1.38 -1.75,1.62, body extent -1.55,-1.55 1.55,1.55, height 0.8
RES_ERA2AEB2212X [mm]
  rect 0.475x0.5 smd: 1(-0.512,0) 2(0.512,0)
  body extent -0.5,-0.25 0.5,0.25, height 0.35
RESC1005X40X25LL05T05 [mm] "Chip Resistor, 2-Leads, Body 1.05x0.55mm, IPC High Density"
  rect 0.45x0.45 smd: 1(-0.4,0) 2(0.4,0)
  body extent -0.53,-0.28 0.53,0.28, height 0.4
RESC1005X40X25ML05T10 [mm] "Chip Resistor, 2-Leads, Body 1.00x0.50mm, IPC Low Density"
  rect 0.7x0.65 smd: 1(-0.475,0) 2(0.475,0)
  body extent -0.53,-0.27 0.53,0.28, height 0.4
RESC1005X40X25NL05T10 [mm] "Chip Resistor, 2-Leads, Body 1.00x0.50mm, IPC Medium Density"
  rect 0.6x0.55 smd: 1(-0.425,0) 2(0.425,0)
  body extent -0.53,-0.27 0.53,0.28, height 0.4
S2BPHSM4TBLFSN [mm]
  rect 1x3.5 smd: 1(1,-3.25) 2(-1,-3.25)
  rect 1.5x3.4 smd: MP1(3.35,2.5) MP2(-3.35,2.5)
  silkscreen extent -3.95,-5.26 3.95,3.8, body extent -3.95,-4.83 3.95,3.77, height 5.6
SK6812MINI-HS [mm]
  rect 1.5x1 smd: 1(1.65,-0.9) 2(1.65,0.9) 3(-1.65,0.9) 4(-1.65,-0.9)
  silkscreen extent -2.99,-1.78 2.16,1.78, body extent -1.85,-1.75 1.85,1.75, height 1.1
SM02BGHSTBLFSN [mm]
  rect 0.6x1.7 smd: 1(-1.85,4.3) 2(-0.6,4.3)
  rect 1x2.7 smd: MP1(-3.7,1.1) MP2(1.25,1.1)
  silkscreen extent -4.1,0 1.65,5.7, body extent -4.11,-0.05 1.65,4.8, height 4.38
SOT230P700X180-4N [mm]
  rect 1.75x0.95 smd: 1(-3.15,2.3) 2(-3.15,0) 3(-3.15,-2.3)
  rect 1.75x3.2 smd: 4(3.15,0)
  silkscreen extent -4.03,-3.25 1.75,3.25, body extent -3.5,-3.25 3.5,3.25, height 1.8
TVS_LESD5D5.0CT1G [mm]
  rect 0.48x0.4 smd: 1(-0.66,0) 2(0.66,0)
  silkscreen extent -1.6,-0.52 0.6,0.52, body extent -0.8,-0.4 0.8,0.4, height 0.7

## Part data
C1 C3 C7 C9 C11 C20: library part CMP-06035-021046-1, "Chip Multilayer Ceramic Capacitors for General Purpose, 0805, 10uF, X6S, 22%, 10%, 35V", Capacitance=10uF, Case Code (Imperial)=0805, Case Code (Metric)=2012, Dielectric=X6S, Max Operating Temperature=105°C, Min Operating Temperature=-55°C, Package Quantity=3000, Tolerance=10%, Voltage Rating=35V, Case/Package=0805, Height=1.25mm, Lead Free="Lead Free", Length=0.079inch, Mount="Surface Mount", Packaging="Tape and Reel", REACH SVHC="No SVHC", Termination=SMD/SMT, Thickness=0.057inch, Voltage Rating (DC)=35V, Weight=0.000335oz, Width=1.25mm
C2 C8 C10 C14 C15 C21: library part CMP-2000-05393-2, "Multilayer Ceramic Capacitors 100nF ±10% 50V X7R SMD 0402", Capacitance=0.1uF, Case Code (Imperial)=0402, Case Code (Metric)=1005, Dielectric=X7R, Dielectric Material=Ceramic, Max Operating Temperature=125°C, Min Operating Temperature=-55°C, Package Quantity=1, Tolerance=10%, Voltage=50V, Case/Package=0402, Construction=Flat, Depth=0.5mm, Height=0.5mm, Lead Free="Lead Free", Length=1mm, Mount="Surface Mount", Packaging="Tape and Reel", Radiation Hardening=No, REACH SVHC="No SVHC", Resistor Type=Ceramic, RoHS Compliant=Yes, Series=C, Termination=SMD/SMT, Thickness=0.022inch, Voltage Rating=50V, Voltage Rating (DC)=50V, Weight=2.3E-05oz, Width=0.02inch
C4: library part CMP-06035-021046-1, "Chip Multilayer Ceramic Capacitors for General Purpose, 0805, 10uF, X6S, 22%, 10%, 35V", Capacitance="10uF (NC)", Case Code (Imperial)=0805, Case Code (Metric)=2012, Dielectric=X6S, Max Operating Temperature=105°C, Min Operating Temperature=-55°C, Package Quantity=3000, Tolerance=10%, Voltage Rating=35V, Case/Package=0805, Height=1.25mm, Lead Free="Lead Free", Length=0.079inch, Mount="Surface Mount", Packaging="Tape and Reel", REACH SVHC="No SVHC", Termination=SMD/SMT, Thickness=0.057inch, Voltage Rating (DC)=35V, Weight=0.000335oz, Width=1.25mm
C5 C6: library part CMP-2000-06025-2, "Multilayer Ceramic Capacitors 1μF ±10% 50V X5R SMD 0603", Capacitance="1uF (10%)", Case Code (Imperial)=0603, Case Code (Metric)=1608, Dielectric=X5R, Dielectric Material=Ceramic, Max Operating Temperature=85°C, Min Operating Temperature=-55°C, Package Quantity=1, Tolerance=10%, Voltage=50V, Case/Package=0603, Construction=Flat, Depth=0.8mm, Height=0.8mm, Lead Free="Lead Free", Length=1.6mm, Mount="Surface Mount", Number of Pins=2, Packaging="Tape and Reel", Radiation Hardening=No, REACH SVHC="No SVHC", Resistor Type=Ceramic, RoHS Compliant=Yes, Series=C, Termination=SMD/SMT, Thickness=0.035inch, Voltage Rating=50V, Voltage Rating (DC)=50V, Weight=7.1E-05oz, Width=0.031inch
C12 C13: library part CMP-2000-05393-2, "Multilayer Ceramic Capacitors 100nF ±10% 50V X7R SMD 0402", Capacitance="0.1uF (NC)", Case Code (Imperial)=0402, Case Code (Metric)=1005, Dielectric=X7R, Dielectric Material=Ceramic, Max Operating Temperature=125°C, Min Operating Temperature=-55°C, Package Quantity=1, Tolerance=10%, Voltage=50V, Case/Package=0402, Construction=Flat, Depth=0.5mm, Height=0.5mm, Lead Free="Lead Free", Length=1mm, Mount="Surface Mount", Packaging="Tape and Reel", Radiation Hardening=No, REACH SVHC="No SVHC", Resistor Type=Ceramic, RoHS Compliant=Yes, Series=C, Termination=SMD/SMT, Thickness=0.022inch, Voltage Rating=50V, Voltage Rating (DC)=50V, Weight=2.3E-05oz, Width=0.02inch
C16 C17: library part CMP-2100-03590-1, "Chip Capacitor, 22 pF, +/- 5%, 50 V, -55 to 125 degC, 0402 (1005 Metric), RoHS, Tape and Reel", Capacitance=22pF, Case Code (Imperial)=0402, Case Code (Metric)=1005, Dielectric=C0G, Dielectric Material=Ceramic, Insulation Resistance=100GR, Manufacturer=Yageo, Max Operating Temperature=125degC, Min Operating Temperature=-55degC, Package Description="2-Pin Surface Mount Device, Body 1 x 0.5 mm", Package Quantity=1, Temperature Coefficient=30ppm/degC, Tolerance=5%, Voltage Rating=50V, Case/Package=0402, Composition=Ceramic, Datasheet URL=http://www.yageo.com/NewPortal/yageodocoutput?fileName=/pdf/MLCC/UPY-GP_NP0_16V-to-50V_14.pdf, Datasheet Version="Rev. 14, 07/2016", Depth=0.5mm, Height=0.5mm, Lead Free=LeadFree, Length=1mm, Manufacturer URL=http://www.yageo.com/, Mount=SurfaceMount, Number of Pins=2, Package Reference=0402, Packaging=TapeandReel, Radiation Hardening=No, REACH SVHC=NoSVHC, RoHSCompliant=True, Termination=SMD/SMT, Thickness=0.022inch, Voltage Rating (DC)=50V, Width=0.02inch
C18 C19: library part CMP-03020-004540-2, "CAP CER 470PF 50V C0G/NP0 0402", Capacitance="470 pF", Manufacturer=Kemet, Package=C0402-BB, Temperature="-55°C to +125°C", Temperature Characteristic=C0G, Temperature Coefficient=15%, Temperature Range High=+125°C, Temperature Range Low=-55°C, Tolerance=0.05, Voltage Rating="50 V", Automotive=No, Category=Cap, ComponentLink2Description=Datasheet, ComponentLink2URL=https://content.kemet.com/datasheets/KEM_C1002_X7R_SMD.pdf, Device Class L1="Passive Components", Device Class L2=Capacitors, Device Class L3="Ceramic Capacitors", Digikey Description="CAP CER 470PF 50V C0G/NP0 0402", Height=0.55mm, Ipc Land Pattern Name=CAPC10050X50, Lead Free=Yes, Manufacturer Part Number=C0402C471J5GACAUTO, Material=Ceramic, Octopart=https://octopart.com/c0402c471j5gacauto-kemet-34993933, RoHS=TRUE
D1 D5: library part CMP-0303-00003-3, "DIODE SCHOTTKY 40V 1A SOD123", Average Rectified Current=1A, Capacitance=110pF, Case/Package=SOD-123-2, Forward Voltage=450mV, Max Forward Surge Current (Ifsm)=25A, Max Operating Temperature=125°C, Max Power Dissipation=450mW, Max Repetitive Reverse Voltage (Vrrm)=40V, Min Operating Temperature=-65°C, Package Quantity=3000, Peak Reverse Current=50uA, Contact Plating=Tin, Current Rating=1A, Element Configuration=Single, Forward Current=1A, Height=1.25mm, Lead Free="Lead Free", Length=2.85mm, Max Reverse Voltage (DC)=40V, Number of Pins=2, Output Current=1A, Packaging="Tape and Reel", Peak Non-Repetitive Surge Current=25A, Polarity=Standard, Radiation Hardening=No, REACH SVHC="No SVHC", Termination=SMD/SMT, Voltage Rating (DC)=40V, Weight=0.000353oz, Width=1.7mm
D2 D3 D4 D6 D7 D8: "Transient Voltage Suppressors for ESD Protection", Package=None, Availability="Not in stock", Check_prices=https://www.snapeda.com/parts/LESD5D5.0CT1G/Leshan+Radio+Co./view-part/?ref=eda, MF="Leshan Radio Co.", MP=LESD5D5.0CT1G, Price=None, SnapEDA_Link=https://www.snapeda.com/parts/LESD5D5.0CT1G/Leshan+Radio+Co./view-part/?ref=snap
D9: library part CMP-2000-06623-2, "LED RED CLEAR CHIP SMD", Case Code (Imperial)=0603, Case Code (Metric)=1608, Color=Red, Forward Current=5mA, Forward Voltage=2.3V, Lens Color=Colorless, Max Operating Temperature=85°C, Min Operating Temperature=-55°C, Package Quantity=3000, Power Dissipation=50mW, Reverse Voltage=5V, Case/Package=0603, Depth=0.8mm, Dominant Wavelength=631nm, Height=0.35mm, Illumination Color=Red, Lead Free="Lead Free", Length=1.6mm, Lens Style=Diffused, Lens Transparency=Clear, Luminous Intensity=45mcd, Mount="Surface Mount", Number of Elements=1, Number of LEDs=1, Number of Pins=2, Packaging="Tape and Reel", Radiation Hardening=No, Test Current=5mA, Viewing Angle=130°, Width=0.8mm
DS1: library part CMP-1744-00002-1, "Chip LED, Green, 2.2 V, -40 to 85 degC, 2-Pin SMD, RoHS, Tape and Reel", Case\Package=SOIC, Clock Frequency="100 KHz", Frequency="400 KHz", Max Operating Temperature="85 degC", Max Supply Voltage="5.5 V", Min Operating Temperature="-40 degC", Min Supply Voltage="1.7 V", Nominal Supply Current="2 mA", Package Quantity=3000, Access Time="3500 ns", ComponentLink1Description="Manufacturer URL", ComponentLink1URL=http://www.avagotech.com/, ComponentLink2Description=Datasheet, ComponentLink2URL=http://docs.avagotech.com/docs/AV02-0551EN, ComponentLink3Description="Package Specification", ComponentLink3URL=http://www.fairchildsemi.com/dwg/MA/MA03D.pdf, DatasheetVersion=Mar-12, Density="32 kb", Height="1.5 mm", Interface=Serial, Length="5 mm", Max Clock Frequency="100 KHz", Mount="Surface Mount", PackageDescription="2-Pin Surface Mount Device, Body 1.6 x 0.8 mm, Height 0.9 mm", PackageReference=HSMX-C190, Packaging="Tape and Reel", Pins=8, Radiation Hardening=No, REACH SVHC="No SVHC", RoHSCompliant=true, Width="4 mm"
IC1: "Integrated Circuit", Manufacturer_Name="Analog Devices", Mouser Part Number=700-MAX98357AETE+T, Arrow Part Number=MAX98357AETE+T, Arrow Price/Stock=https://www.arrow.com/en/products/max98357aetet/analog-devices.html?utm_currency=USD&region=asia, Datasheet Link=https://datasheets.maximintegrated.com/en/ds/MAX98357A-MAX98357B.pdf, Height=0.8mm, Manufacturer_Part_Number=MAX98357AETE+T, Mouser Price/Stock=https://www.mouser.co.uk/ProductDetail/Analog-Devices-Maxim-Integrated/MAX98357AETE%2bT?qs=AAveGqk956HhNpoJjF5x2g%3D%3D
J1 J2 J4 J5 J6 J7 J8 J9 J10 J11: "Connector", Manufacturer_Name="JST (JAPAN SOLDERLESS TERMINALS)", Manufacturer_Part_Number=SM02B-GHS-TB(LF)(SN);-, Mouser Part Number=306-SM02BGHSTBLFSN, Datasheet Link=https://www.jst-mfg.com/product/pdf/eng/eGH.pdf?5f47a99109e2b, Height=4.25mm, Mouser Price/Stock=https://www.mouser.co.uk/ProductDetail/JST-Commercial/SM02B-GHS-TBLFSN-?qs=QpmGXVUTftESG1q8ruD2pA%3D%3D
J3 J12: library part CMP-2000-05823-1, "Micro USB, Receptacle, -55 to 85 degC, 5-Pin SMD, RoHS, Tape and Reel", Manufacturer="FCI Electronics", Package Description="5-Pin Surface Mount Device, Body 8.06 x 5.6 mm, Pitch 0.65 mm", Connector Mounting=PCB, Connector Type=USBMicroB, Contact Plating=Gold, Contact Termination=SurfaceMountRightAngle, Datasheet URL=http://portal.fciconnect.com/Comergent//fci/drawing/10104110.pdf, Datasheet Version="Rev. C, 03/2011", Gender=Receptacle, Manufacturer URL=http://portal.fciconnect.com/, Mounting Technology=SurfaceMount, No. of Contacts=5, Package Reference=10104110-0001LF
J14: "Connector", Arrow Part Number=S2B-PH-SM4-TB(LF)(SN), Manufacturer_Name="JST (JAPAN SOLDERLESS TERMINALS)", Mouser Part Number=N/A, Arrow Price/Stock=https://www.arrow.com/en/products/s2b-ph-sm4-tb-lf-sn/jst-manufacturing?utm_currency=USD&region=europe, Datasheet Link=https://www.jst-mfg.com/product/pdf/eng/ePH.pdf, Height=6.6mm, Manufacturer_Part_Number=S2B-PH-SM4-TB(LF)(SN), Mouser Price/Stock=https://www.mouser.co.uk/ProductDetail/JST-Commercial/S2B-PH-SM4-TBLFSN?qs=QpmGXVUTftEA9IU90i0xlg%3D%3D
LED1: "LED", Manufacturer_Name="Intelligent LED Solutions", Manufacturer_Part_Number=ILPH-K501-RGBW-SK6812-05-01, Datasheet Link=https://docs.rs-online.com/4a12/A700000006465151.pdf, Height=1.7mm
Q1 Q2: "25V 225mW 800mA NPN SOT-23(SOT-23-3) Bipolar Transistors - BJT ROHS"
R1 R4 R9 R12 R13 R14: library part CMP-2000-07451-1, "Chip Resistor, 0 Ohm, 0.1 W, -55 to 155 degC, 0402 (1005 Metric), RoHS, Tape and Reel", Case Code (Imperial)=0402, Case Code (Metric)=1005, Manufacturer=Panasonic, Max Operating Temperature=155degC, Max Power Dissipation=100mW, Min Operating Temperature=-55degC, Package Description="2-Pin Surface Mount Device, Body 1 x 0.5 mm", Package Quantity=1, Package Reference=402, Resistance="0 (5%)", Temperature Coefficient=600ppm/��C, Tolerance=5%, Voltage Rating=50V, Case/Package=0402, Composition=ThickFilm, Contact Plating=Tin, Datasheet URL=https://industrial.panasonic.com/cdbs/www-data/pdf/RDA0000/AOA0000C301.pdf, Datasheet Version=03/2015, Depth=0.5mm, Height=0.35mm, Lead Free=LeadFree, Length=1mm, Manufacturer URL=http://www.panasonic.com/, Military Standard=Not, Mount=SurfaceMount, Mounting Technology=SurfaceMount, Number of Terminations=2, Packaging=TapeandReel, Power Rating=100mW, Radiation Hardening=No, REACH SVHC=NoSVHC, RoHSCompliant=True, Termination=SMD/SMT, Voltage Rating (DC)=50V, Width=0.02inch
R2 R5 R8 R16 R17 R18 R19 R20 R21: library part CMP-2002-03043-1, "1", Manufacturer="Vishay Dale", Resistance=10k, Part Number=CRCW040210K0FKEDHP
R3: "Res Thin Film 0402 22.1K Ohm 0.1% 1/16W ±25ppm/°C Molded SMD Punched Paper T/R", Package=None, Availability=Unavailable, MP=ERA2AEB2212X, Price=None
R6: library part CMP-2002-07753-1, Manufacturer="Yageo / Phycomp", Resistance=5.1k, Part Number=RC0402FR-075K1L
R7: library part CMP-2002-00418-1, Manufacturer="Vishay Dale", Resistance=47.5k, Part Number=CRCW040247K5FKTD
R10: library part CMP-2002-03043-1, "1", Manufacturer="Vishay Dale", Resistance="10k (NC)", Part Number=CRCW040210K0FKEDHP
R11: library part CMP-250906-288381-1, "RES Thin Film,  1kΩ, 0.1%, 0.063W, 50ppm/°C, 0402", Resistance=1k, RoHS Compliant=Yes
R15: library part CMP-2002-00605-3, "Chip Resistor, 100 Ohm, +/- 1%, 100 mW, -55 to 155 degC, 0402 (1005 Metric), RoHS, Tape and Reel", Case Code (Imperial)=0402, Case Code (Metric)=1005, Manufacturer="Basic Passives", Max Operating Temperature="155 degC", Min Operating Temperature="-55 degC", Package Quantity=10000, Power Rating="100 mW", Resistance=100, Tolerance=1%, Voltage Rating="50 V", Case\/Package=0402, ComponentLink1Description="Manufacturer URL", ComponentLink1URL=http://www.panasonic.com/, ComponentLink2Description=Datasheet, ComponentLink2URL=http://industrial.panasonic.com/cdbs/www-data/pdf/RDA0000/AOA0000C86.pdf, DatasheetVersion=04/2015, Height="0.35 mm", Length="1 mm", Mount="Surface Mount", Mounting Technology="Surface Mount", PackageDescription="2-Pin Surface Mount Device, Body 1 x 0.5 mm", PackageReference=0402, Packaging="Tape and Reel", PartNumber=ERJ-2RKF1000X, Pins=2, Radiation Hardening=No, REACH SVHC=Yes, RoHSCompliant=true, Width="0.5 mm"
R22: library part CMP-2002-07343-1, Manufacturer="Yageo / Phycomp", Resistance=100k, Part Number=RC0402FR-07100KL
S1 S2: "4-pin Switch", Manufacturer_Name="N&H Technology", Datasheet Link=https://www.nh-technology.de/T-Mec/PDF/Series_TC/NTC013.pdf, Height=2.7mm, Manufacturer_Part_Number=NTC013-AT1J-A160T
U1: "Bluetooth, WiFi 802.11b/g/n, Bluetooth v5.0 Transceiver Module 2.4GHz PCB Trace Surface Mount", Manufacturer_Name="Espressif Systems", Mouser Part Number=356-SP32S3WM2N32R16V, Supplier Part Number 1=1965-ESP32-S3-WROOM-2-N32R16VDKR-ND, Datasheet Link=https://www.digikey.in/en/products/detail/espressif-systems/ESP32-S3-WROOM-2-N32R16V/25811280, Geometry.Height=3.25mm, Manufacturer_Part_Number=ESP32-S3-WROOM-2-N32R16V, Mouser Price/Stock=https://www.mouser.co.uk/ProductDetail/Espressif-Systems/ESP32-S3-WROOM-2-N32R16V?qs=%252BHhoWzUJg4Kf%2FwmS40wg%252BQ%3D%3D, Supplier 1=DigiKey
U2: library part SGM2212-3.3XKC3G_TR, "80dB@(120Hz) 80", Manufacturer_Name=SGMICRO, Datasheet Link=http://cn.sg-micro.com/uploads/soft/20220506/1651835177.pdf, Height=1.8mm, Manufacturer_Part_Number=SGM2212-3.3XKC3G/TR, Supplier 1=Avnet, Supplier Part Number 1=SGM2212-3.3XKC3G/TR
U3: library part CMP-08093-000005-1, "IC USB TO UART BRIDGE QFN28"
U4: library part CMP-2000-05075-4, "IMU ACCEL/GYRO/MAG I2C 28LGA", Case/Package=LGA, Max Operating Temperature=85°C, Min Operating Temperature=-40°C, Lead Free="Lead Free", Mount="Surface Mount", Output Type=I2C, Packaging="Tape and Reel", Sensor Type=Accelerometer
Y1: library part CMP-0447-00001-4, "Crystal 32.768kHz ±20ppm (Tol) 12.5pF FUND 70kΩ 2-Pin CSMD T/R", Case/Package=CSMD, ESR (Equivalent Series Resistance)=70kR, Frequency=32.768kHz, Frequency Tolerance=20ppm, Load Capacitance=12.5pF, Max Operating Temperature=85°C, Min Operating Temperature=-40°C, Operating Frequency="32.768 kHz", Package Quantity=3000, Depth=1.5mm, Height=0.9mm, Lead Free="Lead Free", Length=3.2mm, Number of Pins=2, Packaging="Tape and Reel", Radiation Hardening=No, REACH SVHC="No SVHC", RoHS Compliant=Yes, Series=ABS07, Series Resistance=70kR, Termination=SMD/SMT, Tolerance=20ppm, Width=1.5mm

## Via types
v1: diameter 0.61, hole 0.305, Top Layer to Bottom Layer, tented both sides, 195 vias
v2: diameter 1.27, hole 0.711, Top Layer to Bottom Layer, tented both sides, 2 vias

## Nets (pads, with @x,y where several pads share a name; then routed paths per layer and width w, separated by ;. In a path a pad name is that pad's centre, name@x,y a point inside that pad or via, vN(x,y) a via of type N, cw(c..) or ccw(c..) an arc to the next point about the centre after c; other vN are vias at no path point)
ADC1_CH0: J2.2 U1.39 | length 76.5
  Top Layer w0.254: J2.2 4.709,38.237 8.499,38.237 v1(8.509,38.227) ; v1(46.482,3.81) 46.482,2.582 U1.39
  Bottom Layer w0.254: v1(8.509,38.227) 13.075,33.661 23.518,33.661 26.162,31.016 26.162,4.953 30.226,0.889 46.101,0.889 46.482,1.27 v1(46.482,3.81)
ADC1_CH1: J5.2 U1.38 | length 85.1
  Top Layer w0.254: J5.2 3.429,51.901 7.832,47.498 v1(9.779,47.498) ; v1(45.212,3.81) 45.212,2.582 U1.38
  Bottom Layer w0.254: v1(9.779,47.498) 9.779,39.751 11.923,37.607 11.923,37.577 15.336,34.163 23.554,34.163 26.543,31.174 26.543,5.461 30.607,1.397 42.799,1.397 v1(45.212,3.81)
ADC1_CH2: J7.2 U1.15 | length 40.4
  Top Layer w0.254: v1(19.558,49.149) 19.594,49.185 19.594,52.39 J7.2 ; U1.15 30.021,18.288 v1(31.369,18.288)
  Bottom Layer w0.254: v1(19.558,49.149) 19.558,41.464 28.829,32.193 28.829,20.828 v1(31.369,18.288)
ADC1_CH6: J9.2 U1.7 | length 41.7
  Top Layer w0.254: J9.2 36.005,52.387 36.005,48.959 v1(36.068,48.895) ; v1(40.132,18.796) 40.132,20.05 U1.7
  Bottom Layer w0.254: v1(36.068,48.895) 30.048,42.875 30.048,36.418 40.132,26.334 v1(40.132,18.796)
ADC1_CH7: J11.2 U1.12 | length 49.1
  Top Layer w0.254: v1(27.432,46.863) 42.777,46.863 43.646,47.732 J11.2 ; v1(33.782,18.796) 33.782,20.05 U1.12
  Bottom Layer w0.254: v1(27.432,46.863) 27.432,36.879 33.782,30.529 v1(33.782,18.796)
ADC1_CH9: U1.18
ADC2_CH0: J1.2 U1.19 | length 60
  Top Layer w0.254: J1.2 v1(8.255,46.355) ; U1.19 30.021,13.208 v1(31.369,13.208)
  Bottom Layer w0.254: v1(8.255,46.355) 8.255,48.514 9.463,49.722 11.803,49.722 12.13,49.395 12.13,47.814 16.764,43.18 16.764,35.963 16.913,35.814 24.13,35.814 28.067,31.877 28.067,18.26 31.369,14.958 v1(31.369,13.208)
ADC2_CH1: J4.2 U1.20 | length 56.1
  Top Layer w0.254: J4.2 11.537,52.391 11.537,49.198 v1(11.571,49.163) ; U1.20 30.021,11.938 v1(31.369,11.938)
  Bottom Layer w0.254: v1(11.571,49.163) 11.557,49.149 11.557,42.926 12.573,41.91 15.407,41.91 15.973,41.344 15.973,35.992 16.532,35.433 23.901,35.433 27.686,31.648 27.686,15.621 v1(31.369,11.938)
ADC2_CH2: R16.1 U1.21 U4.11 | length 46.2
  Top Layer w0.254: v1(15.183,41.344) 15.186,41.347 15.186,42.356 R16.1 15.958,42.36 16.204,42.606 16.811,42.606 U4.11 ; U1.21 30.021,10.668 v1(31.369,10.668)
  Bottom Layer w0.254: v1(15.183,41.344) 15.183,35.617 15.748,35.052 23.743,35.052 27.305,31.49 27.305,14.732 v1(31.369,10.668)
ADC2_CH3: U1.22 U4.14 | length 46.7
  Top Layer w0.254: v1(14.624,40.582) 14.692,40.65 15.279,40.65 15.747,41.118 U4.14 ; U1.22 30.021,9.398 v1(31.369,9.398)
  Bottom Layer w0.254: v1(14.624,40.582) 14.624,35.414 15.494,34.544 23.712,34.544 26.924,31.332 26.924,13.843 v1(31.369,9.398)
ADC2_CH4: J6.2 U1.8 | length 45.7
  Top Layer w0.254: v1(27.813,48.768) J6.2 ; v1(38.862,18.796) 38.862,20.05 U1.8
  Bottom Layer w0.254: v1(27.813,48.768) 27.886,48.768 28.584,49.466 32.223,49.466 32.817,48.872 32.817,46.183 29.667,43.033 29.667,36.26 38.862,27.065 v1(38.862,18.796)
ADC2_CH5: J8.2 U1.9 | length 49.4
  Top Layer w0.254: v1(32.258,48.641) 32.354,48.641 32.659,48.336 37.809,48.336 41.924,52.451 J8.2 ; v1(37.592,18.796) 37.592,20.05 U1.9
  Bottom Layer w0.254: v1(32.258,48.641) 29.286,45.669 29.286,36.102 37.592,27.797 v1(37.592,18.796)
ADC2_CH6: J10.2 U1.10 | length 40.9
  Top Layer w0.254: v1(28.575,39.624) J10.2 ; v1(36.322,18.796) 36.322,20.05 U1.10
  Bottom Layer w0.254: v1(28.575,39.624) 28.575,36.275 36.322,28.528 v1(36.322,18.796)
AUDIO_N: C18.1 IC1.10 J14.2 | length 11.7
  Top Layer w0.254: IC1.10 34.602,35.569 36.04,35.569 36.189,35.718 36.189,35.789 C18.1 36.455,35.789 36.455,35.718 36.604,35.569 37.046,35.569 38.32,34.295 38.32,31.137 39.359,30.099 39.569,30.099 39.718,30.248 39.718,30.472 40.091,30.845 J14.2
AUDIO_P: C19.1 IC1.9 J14.1 | length 11.7
  Top Layer w0.254: IC1.9 35.204,35.064 35.207,35.061 36.04,35.061 36.189,34.913 36.189,34.842 C19.1 36.455,34.842 36.455,34.913 36.604,35.061 36.836,35.061 37.812,34.085 37.812,30.927 39.148,29.591 39.569,29.591 39.718,29.442 39.718,29.218 40.091,28.845 J14.1
CHIP_PU: C5.1 C13.2 R2.1 R4.2 S2.4 U1.3 | length 47
  Top Layer w0.254: v1(7.418,21.971) R4.2 ; S2.4 15.24,16.838 v1(15.24,19.304) 16.699,19.304 16.809,19.413 16.809,19.579 19.328,22.098 42.65,22.098 42.874,22.322 42.874,22.531 43.203,22.86 R2.1 45.212,20.082 U1.3
  Bottom Layer w0.254: v1(7.418,21.971) 7.473,21.971 7.931,21.514 13.03,21.514 v1(15.24,19.304)
DEBUG_LED: DS1.1 R15.1 | length 1.2
  Top Layer w0.254: R15.1 DS1.1
DTR: Q2.1 R5.2 U3.28 | length 28
  Top Layer w0.254: Q2.1 15.146,23.386 15.146,21.485 15.295,21.336 16.368,21.336 17.765,22.733 30.353,22.733 31.242,23.622 31.242,27.94 30.353,28.829 28.34,28.829 U3.28
ESP_3V3: R1.2 R2.2 U1.2 | length 14
  Top Layer w0.508: R1.2 45.283,24.003 46.066,23.22 46.066,22.931 46.137,22.86 R2.2 46.162,20.702 46.498,20.366 U1.2
GND: C1.2 C2.2 C3.2 C4.2 C5.2 C6.2 C7.2 C8.2 C9.2 C10.2 C11.2 C12.1 C13.1 C14.2 C15.2 C16.2 C17.2 C18.2 C19.2 C20.2 C21.2 D2.2 D3.2 D4.2 D6.2 D7.2 D8.2 D9.1 DS1.2 IC1.3 IC1.11 J1.1 J1.MP1 J1.MP2 J2.1 J2.MP1 J2.MP2 J3.4 J3.5 J3.6 J3.7 J3.8 J3.9 J4.1 J4.MP1 J4.MP2 J5.1 J5.MP1 J5.MP2 J6.1 J6.MP1 J6.MP2 J7.1 J7.MP1 J7.MP2 J8.1 J8.MP1 J8.MP2 J9.1 J9.MP1 J9.MP2 J10.1 J10.MP1 J10.MP2 J11.1 J11.MP1 J11.MP2 J12.4 J12.5 J12.6 J12.7 J12.8 J12.9 J14.MP1 J14.MP2 LED1.1 R7.2 R10.2 R19.1 R20.2 R21.1 S1.1 S2.1 U1.1 U1.40 U1.41 U1.42 U1.43 U1.44 U1.45 U1.46 U1.47 U1.48 U1.49 U2.1 U3.3 U3.29 U4.2 U4.10 U4.15 U4.16 U4.18 U4.25
  other v1: 25.146,1.905 2.286,4.445 9.906,4.445 12.446,4.445 20.066,4.445 32.766,4.445 35.306,4.445 37.846,4.445 40.386,4.445 9.906,6.985 14.986,6.985 17.526,6.985 20.066,6.985 27.686,6.985 32.766,6.985 35.306,6.985 37.846,6.985 40.386,6.985 42.926,6.985 45.466,6.985 4.826,9.525 20.066,9.525 27.686,9.525 32.766,9.525 35.306,9.525 37.846,9.525 40.386,9.525 42.926,9.525 45.466,9.525 2.286,12.065 27.686,12.065 32.766,12.065 35.306,12.065 37.846,12.065 45.466,12.065 4.826,14.605 17.526,14.605 22.606,14.605 25.146,14.605 35.306,14.605 37.846,14.605 45.466,14.605 4.826,17.145 35.306,17.145 37.846,17.145 40.386,17.145 42.926,17.145 45.466,17.145 7.366,24.765 9.906,24.765 14.986,24.765 30.226,24.765 45.466,24.765 7.366,27.305 9.906,27.305 12.446,27.305 17.526,27.305 40.386,27.305 30.226,29.845 37.846,29.845 40.386,29.845 45.466,29.845 2.286,32.385 42.926,32.385 2.286,34.925 4.826,34.925 7.366,34.925 9.906,34.925 27.686,34.925 40.386,34.925 42.926,34.925 45.466,34.925 2.286,37.465 4.826,37.465 7.366,37.465 25.146,37.465 37.846,37.465 40.386,37.465 42.926,37.465 45.466,37.465 2.286,40.005 7.366,40.005 12.446,40.005 20.066,40.005 22.606,40.005 25.146,40.005 2.286,42.545 4.826,42.545 7.366,42.545 17.526,42.545 32.766,42.545 35.306,42.545 37.846,42.545 40.386,42.545 42.926,42.545 45.466,42.545 4.826,45.085 7.366,45.085 30.226,45.085 35.306,45.085 37.846,45.085 40.386,45.085 42.926,45.085 45.466,45.085 2.286,47.625 14.986,47.625 27.686,47.625 30.226,47.625 37.846,47.625 40.386,47.625 7.366,50.165 12.446,50.165 14.986,50.165 17.526,50.165 22.606,50.165 25.146,50.165 30.226,50.165 32.766,50.165 35.306,50.165 37.846,50.165 42.926,50.165 45.466,50.165 2.286,52.705 7.366,52.705 9.906,52.705 14.986,52.705 17.526,52.705 22.606,52.705 25.146,52.705 30.226,52.705 32.766,52.705 40.386,52.705 4.826,55.245 12.446,55.245 20.066,55.245 27.686,55.245 32.766,55.245 35.306,55.245 37.846,55.245 40.386,55.245 45.466,55.245
GPIO0: C12.2 R9.2 S1.4 U1.27 | length 51.2
  Top Layer w0.254: C12.2 2.032,19.666 2.902,18.796 v1(2.921,18.796) 2.921,16.828 S1.4 ; v1(12.065,20.955) 12.097,20.987 12.097,21.514 R9.2 ; v1(27.559,2.032) 30.935,2.032 31.258,2.355 U1.27
  Bottom Layer w0.254: v1(2.921,18.796) 9.906,18.796 v1(12.065,20.955) 12.065,15.419 10.617,13.971 10.617,8.532 13.18,5.969 23.622,5.969 v1(27.559,2.032)
GPIO19: D7.1 J12.2 U1.13 | length 40.3
  Top Layer w0.254: J12.2 5.319,6.858 6.081,7.62 D7.1 6.161,7.62 8.066,9.525 v1(11.176,9.525) ; v1(18.161,9.779) 18.161,10.699 19.654,12.192 26.385,12.192 27.559,13.366 27.559,17.95 30.679,21.07 31.824,21.07 32.528,20.366 U1.13
  Bottom Layer w0.254: v1(11.176,9.525) 13.664,9.525 14.731,8.458 17.122,8.458 18.093,9.429 18.093,9.711 v1(18.161,9.779)
GPIO20: D8.1 J12.3 U1.14 | length 36.4
  Top Layer w0.254: J12.3 5.969,5.78 7.809,7.62 D8.1 7.889,7.62 9.032,8.763 v1(11.176,8.763) ; v1(18.923,9.779) 18.923,10.922 19.812,11.811 26.543,11.811 27.94,13.208 27.94,17.792 30.214,20.066 U1.14
  Bottom Layer w0.254: v1(11.176,8.763) 11.862,8.077 17.28,8.077 18.923,9.72 v1(18.923,9.779)
GPIO21: U1.23
GPIO38: R12.1 U1.31 | length 17.5
  Top Layer w0.254: R12.1 26.632,6.261 27,5.893 27,1.801 27.531,1.27 36.068,1.27 36.338,1.54 U1.31
GPIO39: R15.2 U1.32 | length 18.9
  Top Layer w0.254: R15.2 22.23,3.538 24.879,0.889 36.231,0.889 37.608,2.266 U1.32
GPIO40: U1.33
GPIO41: U1.34
GPIO42: U1.35
GPIO45: U1.26
GPIO46: U1.16
GPIO47: U1.24
GPIO48: U1.25
NetC6_1: C6.1 R3.1 R7.1 U3.8 | length 17.1
  Top Layer w0.254: v1(19.05,20.701) 20.693,19.058 22.329,19.058 R3.1 22.34,19.061 23.841,19.061 R7.1 25.521,19.069 C6.1 ; v1(21.209,27.94) 21.23,27.919 22.624,27.919 U3.8
  Bottom Layer w0.254: v1(19.05,20.701) 19.05,25.781 v1(21.209,27.94)
NetC14_1: C14.1 U4.9 | length 1.7
  Top Layer w0.254: C14.1 15.939,43.884 16.204,43.619 16.821,43.619 U4.9
NetD9_2: D9.2 R6.1 | length 1.6
  Top Layer w0.254: R6.1 18.594,34.449 D9.2
NetIC1_1: IC1.1 U1.6 | length 27.4
  Top Layer w0.254: v1(30.607,36.83) 30.703,36.83 30.946,36.587 31.674,36.587 IC1.1 ; v1(41.402,18.796) 41.402,20.05 U1.6
  Bottom Layer w0.254: v1(30.607,36.83) 34.798,36.83 41.402,30.226 v1(41.402,18.796)
NetIC1_4: IC1.4 R22.1 | length 1.3
  Top Layer w0.254: R22.1 31.327,34.969 31.422,35.064 IC1.4
NetIC1_14: IC1.14 U1.5 | length 26.1
  Top Layer w0.254: IC1.14 33.397,38.041 33.837,38.481 v1(33.909,38.481) ; v1(42.672,18.796) 42.672,20.05 U1.5
  Bottom Layer w0.254: v1(33.909,38.481) 42.672,29.718 v1(42.672,18.796)
NetIC1_15: IC1.15 IC1.17 | length 2.8
  Top Layer w0.254: v1(32.893,38.481) 32.895,38.479 32.895,37.266 IC1.15 32.897,36.064 IC1.17
NetIC1_16: IC1.16 U1.4 | length 29.5
  Top Layer w0.254: v1(31.877,38.481) 32.397,37.961 IC1.16 ; v1(43.942,18.796) 43.942,20.05 U1.4
  Bottom Layer w0.254: v1(31.877,38.481) 32.436,39.04 34.14,39.04 43.942,29.238 v1(43.942,18.796)
NetQ1_1: Q1.1 R4.1 | length 1.9
  Top Layer w0.254: R4.1 9.29,22.65 10.084,23.444 Q1.1
NetQ1_3: Q1.3 R5.1 | length 11
  Top Layer w0.254: Q1.3 9.119,25.578 9.766,26.226 15.431,26.226 16.096,25.56 R5.1
NetQ2_2: Q2.2 R9.1 | length 1.6
  Top Layer w0.254: Q2.2 13.354,23.247 R9.1
NetQ2_3: Q2.3 R8.1 | length 5
  Top Layer w0.254: R8.1 11.27,23.208 13.271,25.209 13.805,25.209 14.072,25.476 Q2.3
NetR10_1: R10.1 U3.11 | length 1.8
  Top Layer w0.254: R10.1 20.701,26.027 20.899,26.225 20.924,26.225 21.115,26.416 U3.11
NetR11_2: R11.2 U3.9 | length 3.8
  Top Layer w0.254: R11.2 19.689,28.452 20.32,27.821 20.32,27.572 20.841,27.051 21.577,27.051 21.942,27.416 U3.9
NetR13_1: R13.1 U3.25 | length 1.2
  Top Layer w0.254: U3.25 R13.1
NetR14_1: R14.1 U3.26 | length 1.7
  Top Layer w0.254: U3.26 28.556,26.916 R14.1
NetR17_1: R17.1 U1.11 U4.20 | length 32.9
  Top Layer w0.254: U4.20 19.995,40.57 20.509,40.57 22.098,38.981 R17.1 22.114,38.973 23.098,38.973 v1(23.114,38.989) ; v1(35.052,18.796) 35.052,20.05 U1.11
  Bottom Layer w0.254: v1(23.114,38.989) 24.765,38.989 33.02,30.734 33.02,18.768 33.551,18.237 34.493,18.237 v1(35.052,18.796)
NetR18_1: R18.1 U1.17 U4.19 | length 32.3
  Top Layer w0.254: U4.19 19.135,39.658 19.812,38.981 R18.1 19.828,38.973 20.939,38.973 v1(20.955,38.989) ; U1.17 30.021,15.748 v1(31.369,15.748)
  Bottom Layer w0.254: v1(20.955,38.989) 23.749,36.195 24.288,36.195 28.448,32.035 28.448,18.669 v1(31.369,15.748)
NetR19_2: R19.2 U4.6 | length 1.8
  Top Layer w0.254: R19.2 16.47,45.408 16.76,45.118 U4.6
NetR20_1: R20.1 U4.17 | length 1.8
  Top Layer w0.254: R20.1 17.653,39.661 18.133,40.141 18.133,40.554 U4.17
NetR21_2: R21.2 U4.5 | length 2.6
  Top Layer w0.254: R21.2 17.391,47.625 17.635,47.381 U4.5
RGB_CTRL: LED1.2 R12.2 | length 1.9
  Top Layer w0.254: LED1.2 24.734,9.27 R12.2
RTS: Q1.2 R8.2 U3.24 | length 37.7
  Top Layer w0.254: Q1.2 6.35,23.495 ; R8.2 10.295,21.971 9.406,21.082 6.499,21.082 6.35,21.231 6.35,23.495 ; U3.24 27.43,25.913 27.914,25.913 28.287,25.541 28.287,23.263 28.138,23.114 19.939,23.114 16.447,26.607 7.429,26.607 6.35,25.527 6.35,23.495
RXD0: R14.2 U1.36 | length 30.6
  Top Layer w0.254: R14.2 v1(30.607,27.305) ; v1(42.672,3.81) 42.672,2.582 U1.36
  Bottom Layer w0.254: v1(30.607,27.305) 32.639,25.273 32.639,13.843 v1(42.672,3.81)
TXD0: R13.2 U1.37 | length 31.9
  Top Layer w0.254: R13.2 v1(30.607,26.416) ; v1(43.942,3.81) 43.942,2.582 U1.37
  Bottom Layer w0.254: v1(30.607,26.416) 32.131,24.892 32.131,13.561 42.441,3.251 43.383,3.251 v1(43.942,3.81)
USB_N: D3.1 J3.2 U3.5 | length 33.3
  Top Layer w0.254: J3.2 15.543,4.572 15.543,5.762 16.192,6.412 16.192,7.471 16.044,7.62 ; D3.1 16.044,7.62 ; v1(16.002,9.017) 16.002,8.921 16.192,8.73 16.192,7.769 16.044,7.62 ; U3.5 U3.5 24.526,29.759 24.918,30.151 24.918,30.612 24.765,30.765 v1(24.765,30.861)
  Bottom Layer w0.254: v1(16.002,9.017) 16.002,9.113 16.192,9.304 16.192,16.828 24.892,25.527 24.892,30.534 24.833,30.593 24.833,30.793 v1(24.765,30.861)
USB_P: D4.1 J3.3 U3.4 | length 33
  Top Layer w0.254: J3.3 16.051,4.572 16.051,5.552 16.7,6.201 16.7,7.471 16.849,7.62 ; v1(16.891,9.017) 16.891,8.921 16.7,8.73 16.7,7.769 16.849,7.62 ; D4.1 16.849,7.62 ; U3.4 25.027,29.152 24.983,29.196 24.983,29.57 25.375,29.962 25.375,30.612 25.527,30.765 v1(25.527,30.861)